# Altium PCB BEESC_v1.PcbDoc (part 1 of 4)
Units mm, origin at the board's own origin, x right, y up, seen from the top; angles counter-clockwise.
Board outline 50 x 44.5 mm, 6 copper layers (Top Layer, GND, SIG, SIG/PWR, GND2, Bottom Layer), stack 1.481 mm thick; 122 components, 109 nets, 495 pads, 357 vias.
Unrouted connection lines stored in the file: 71.
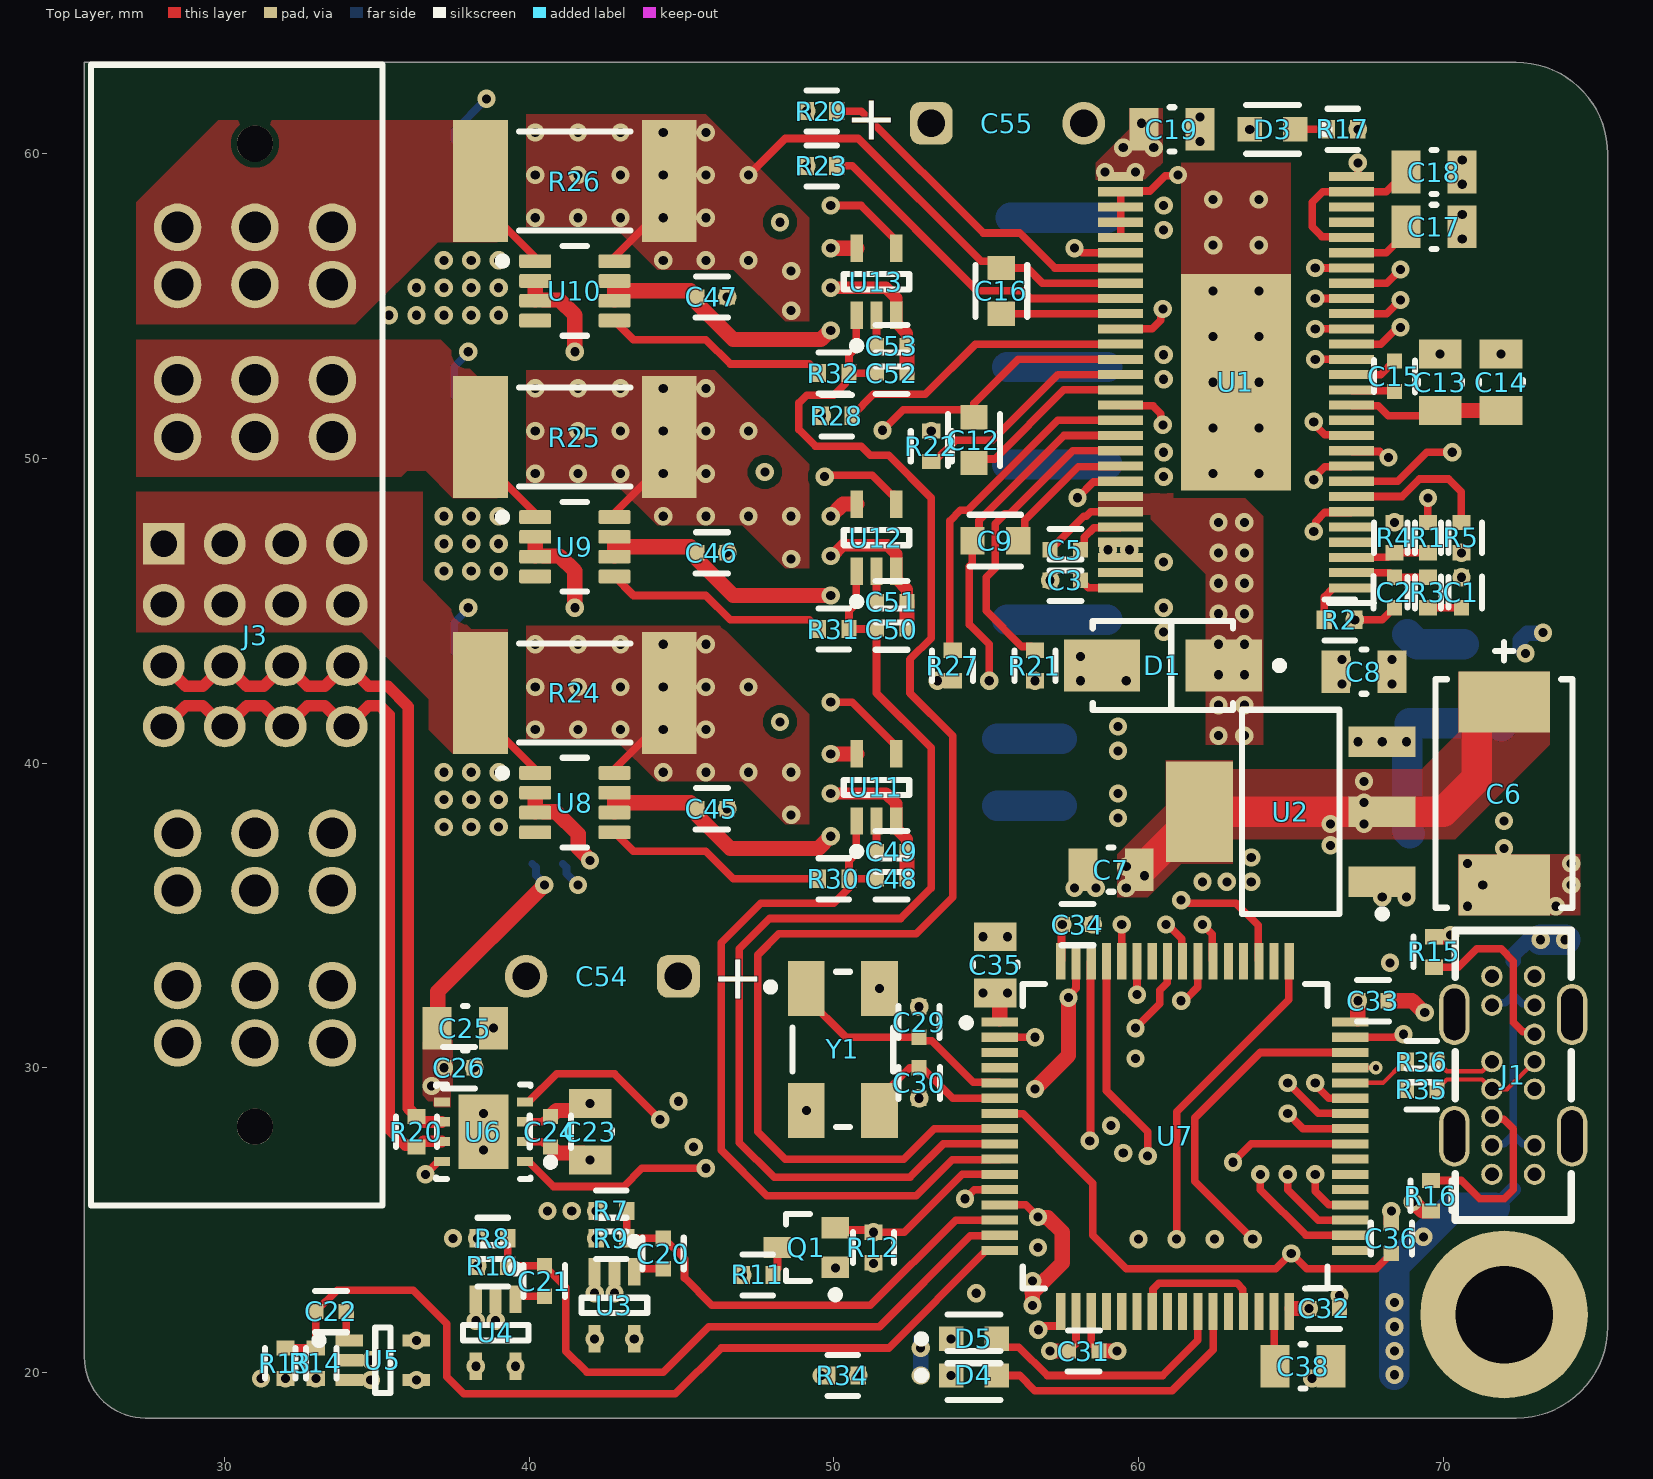
[diagram p0: Top Layer view]
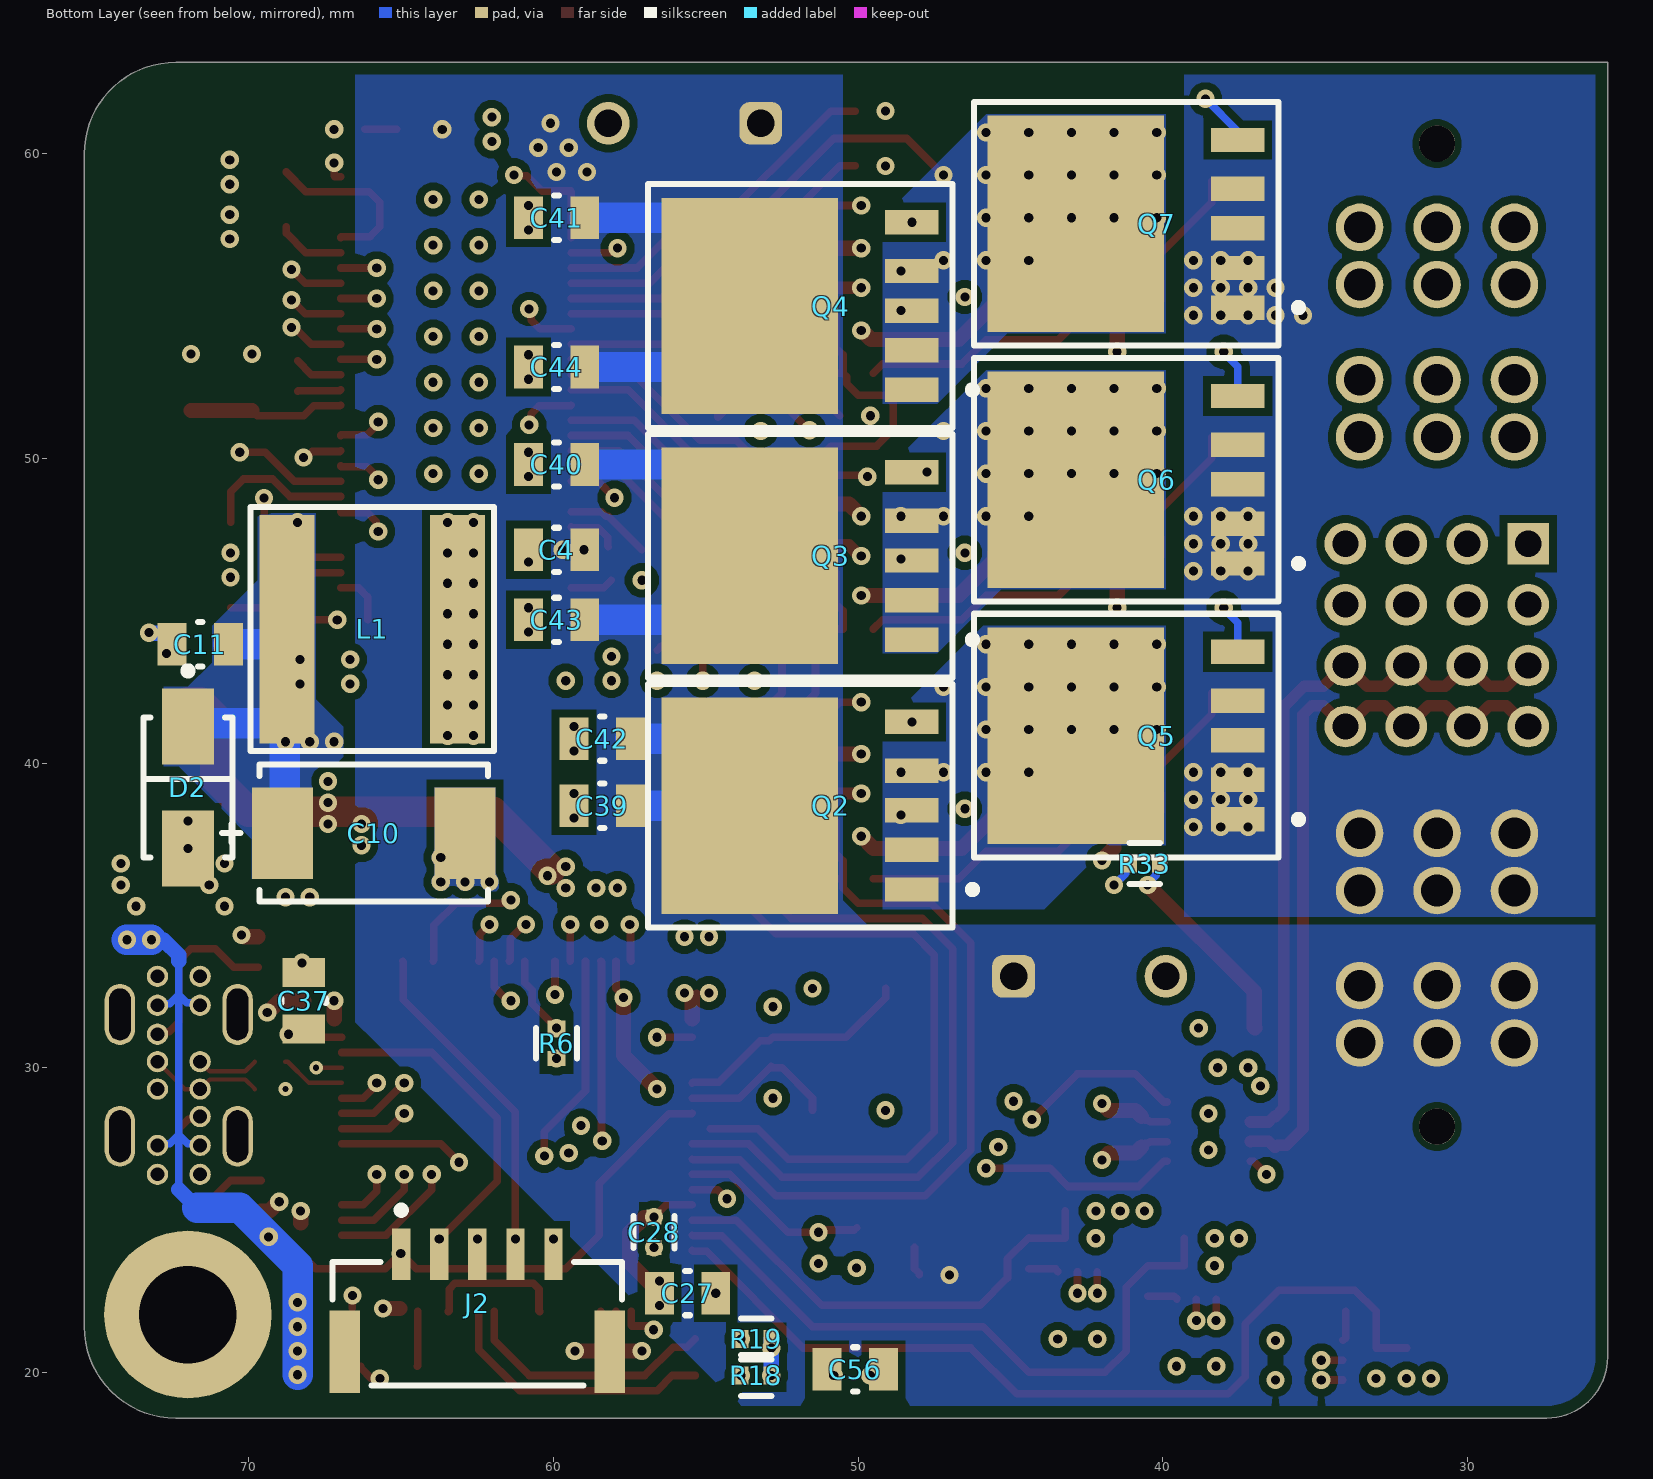
[diagram p1: Bottom Layer view, seen from below]
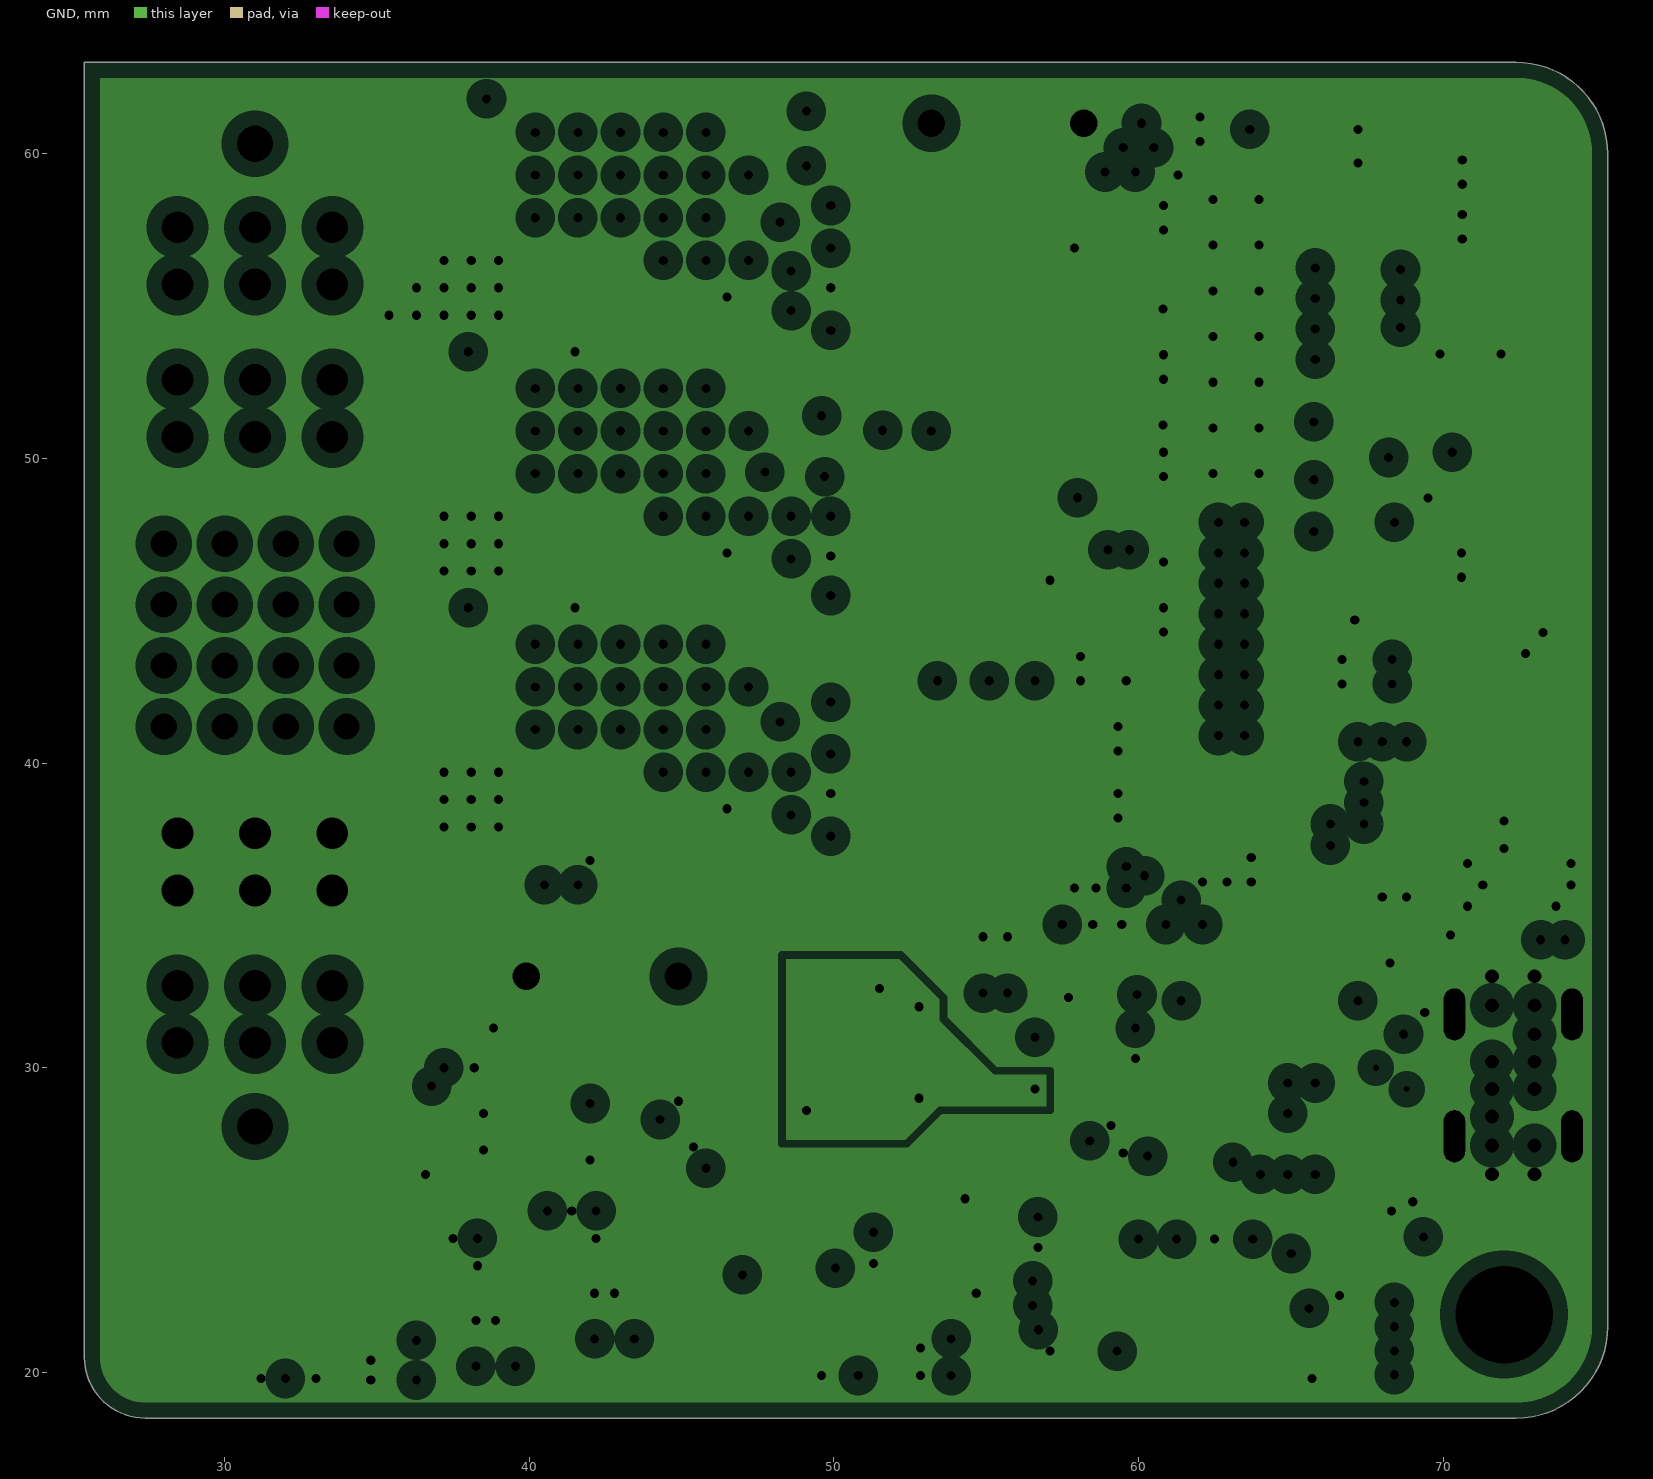
[diagram p2: GND, clearances drawn from the general rule]
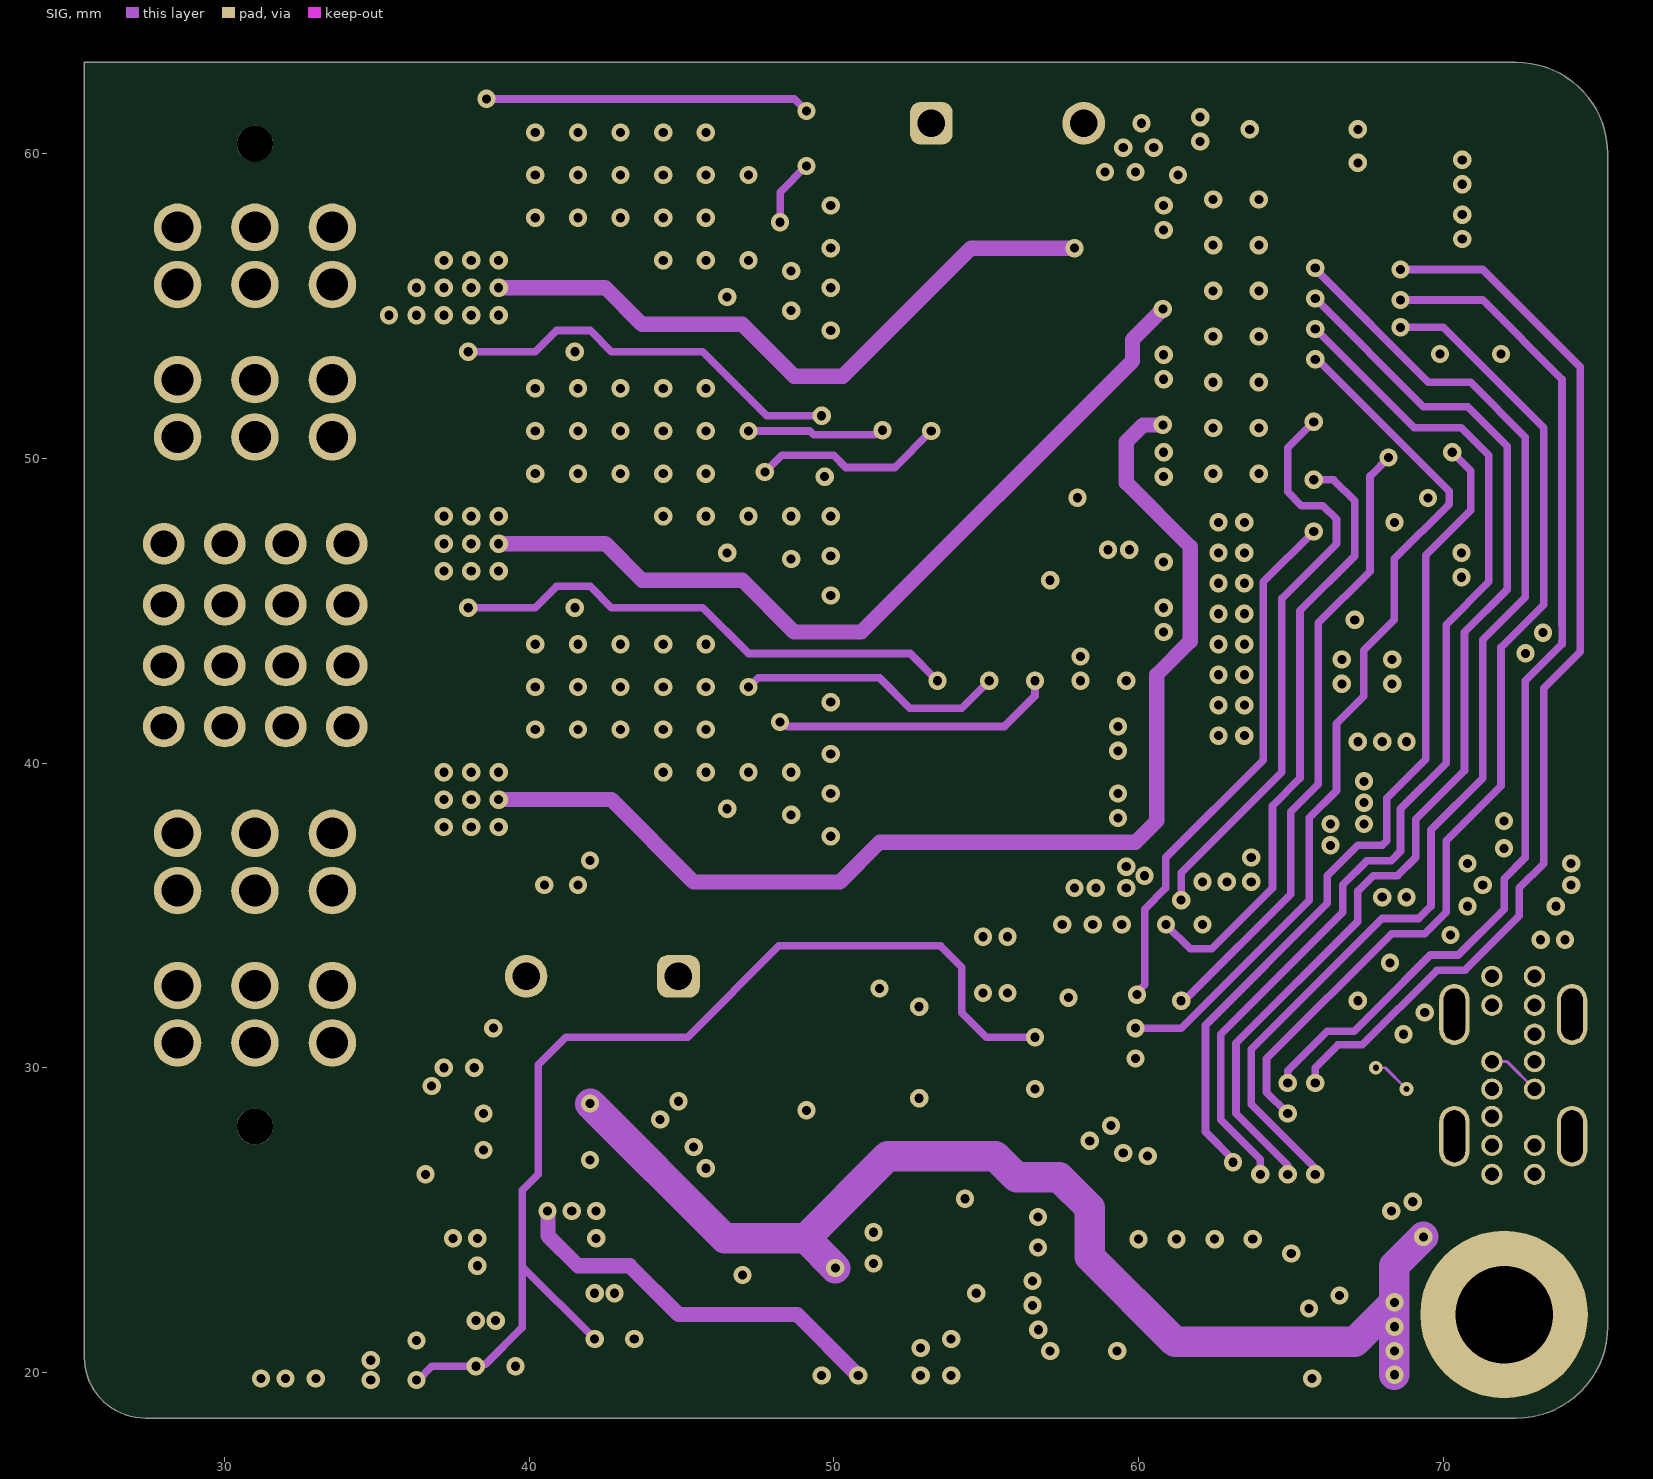
[diagram p3: SIG]
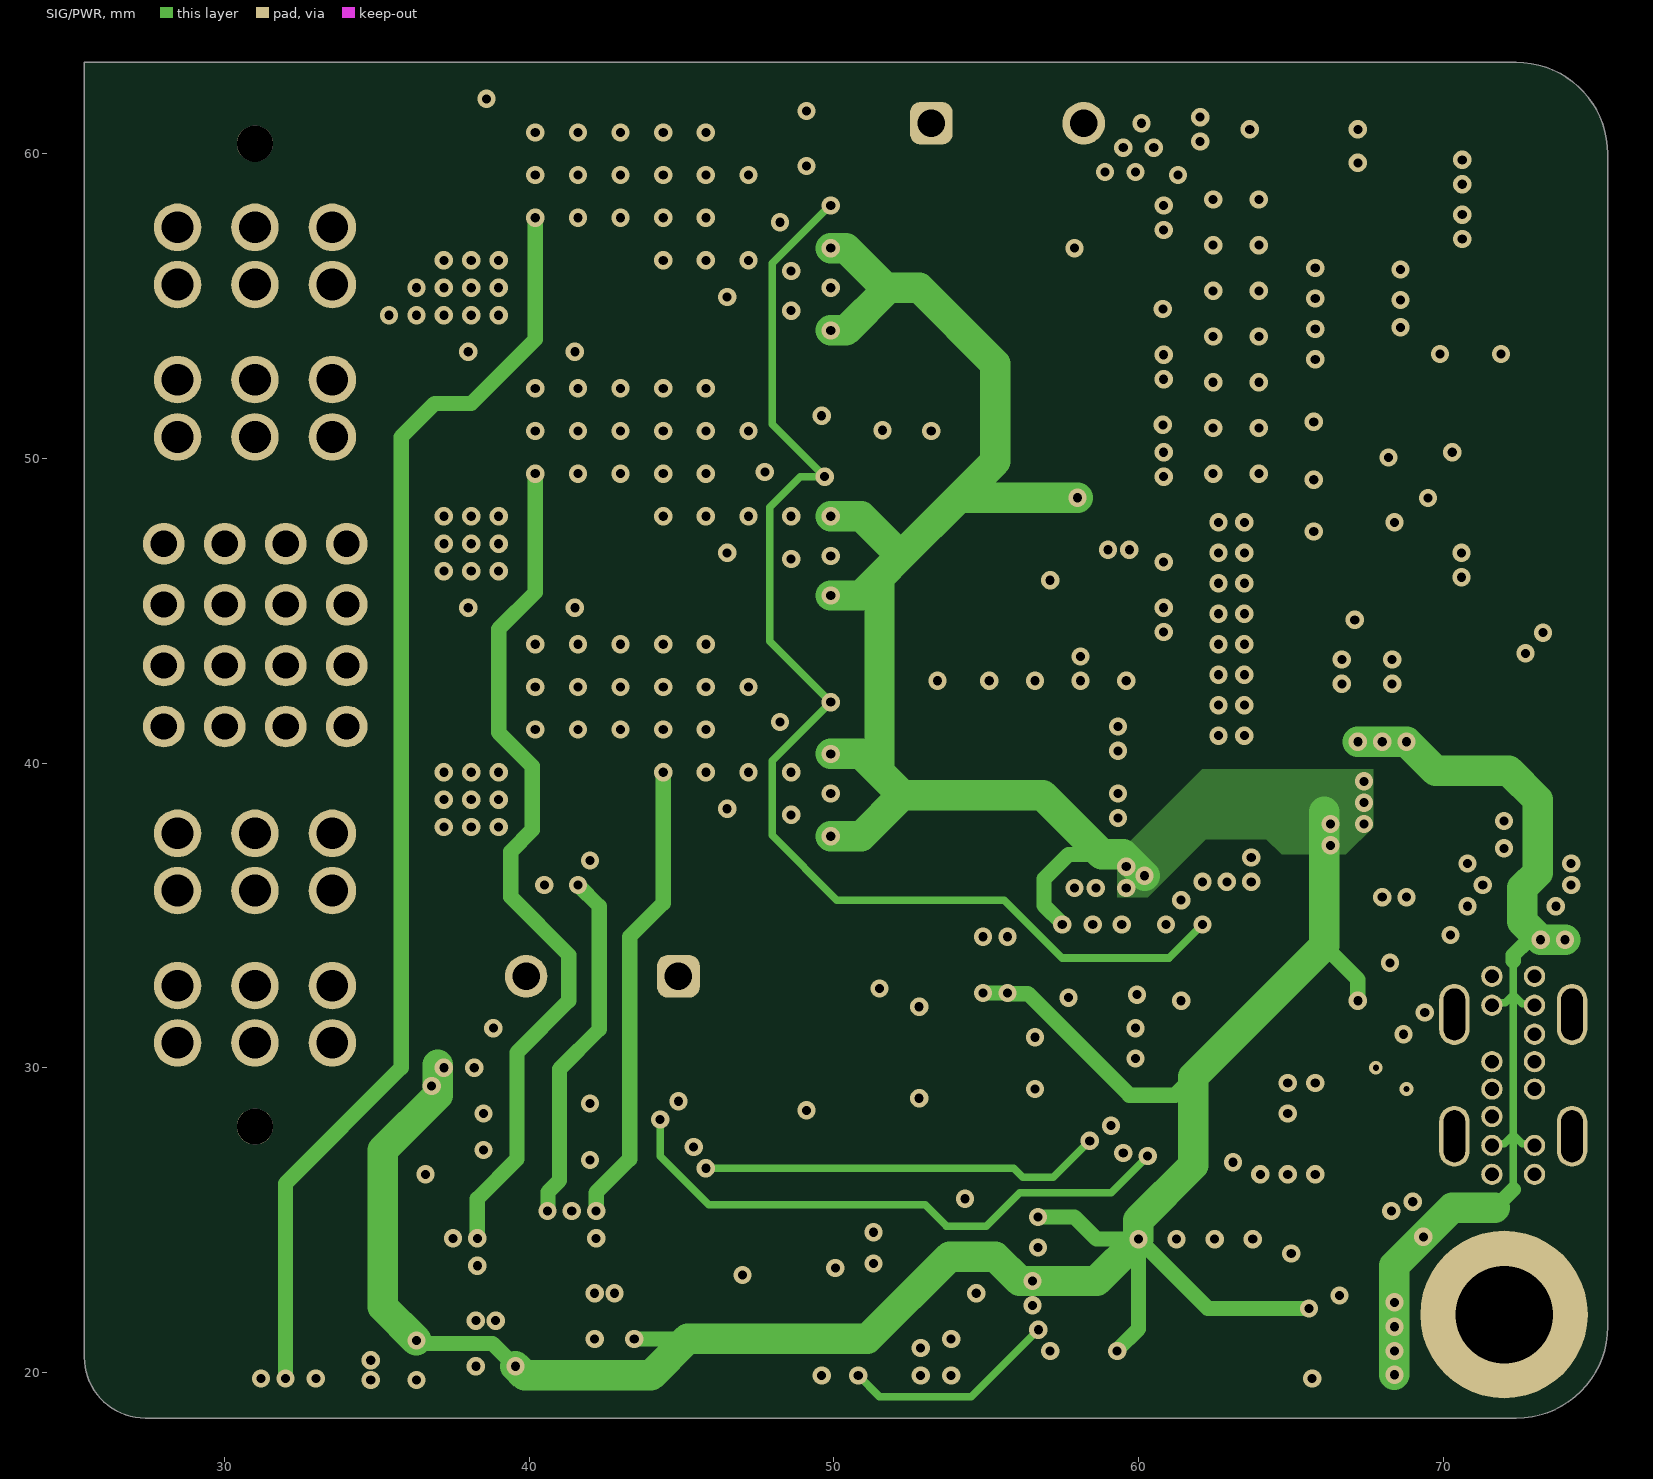
[diagram p4: SIG/PWR]
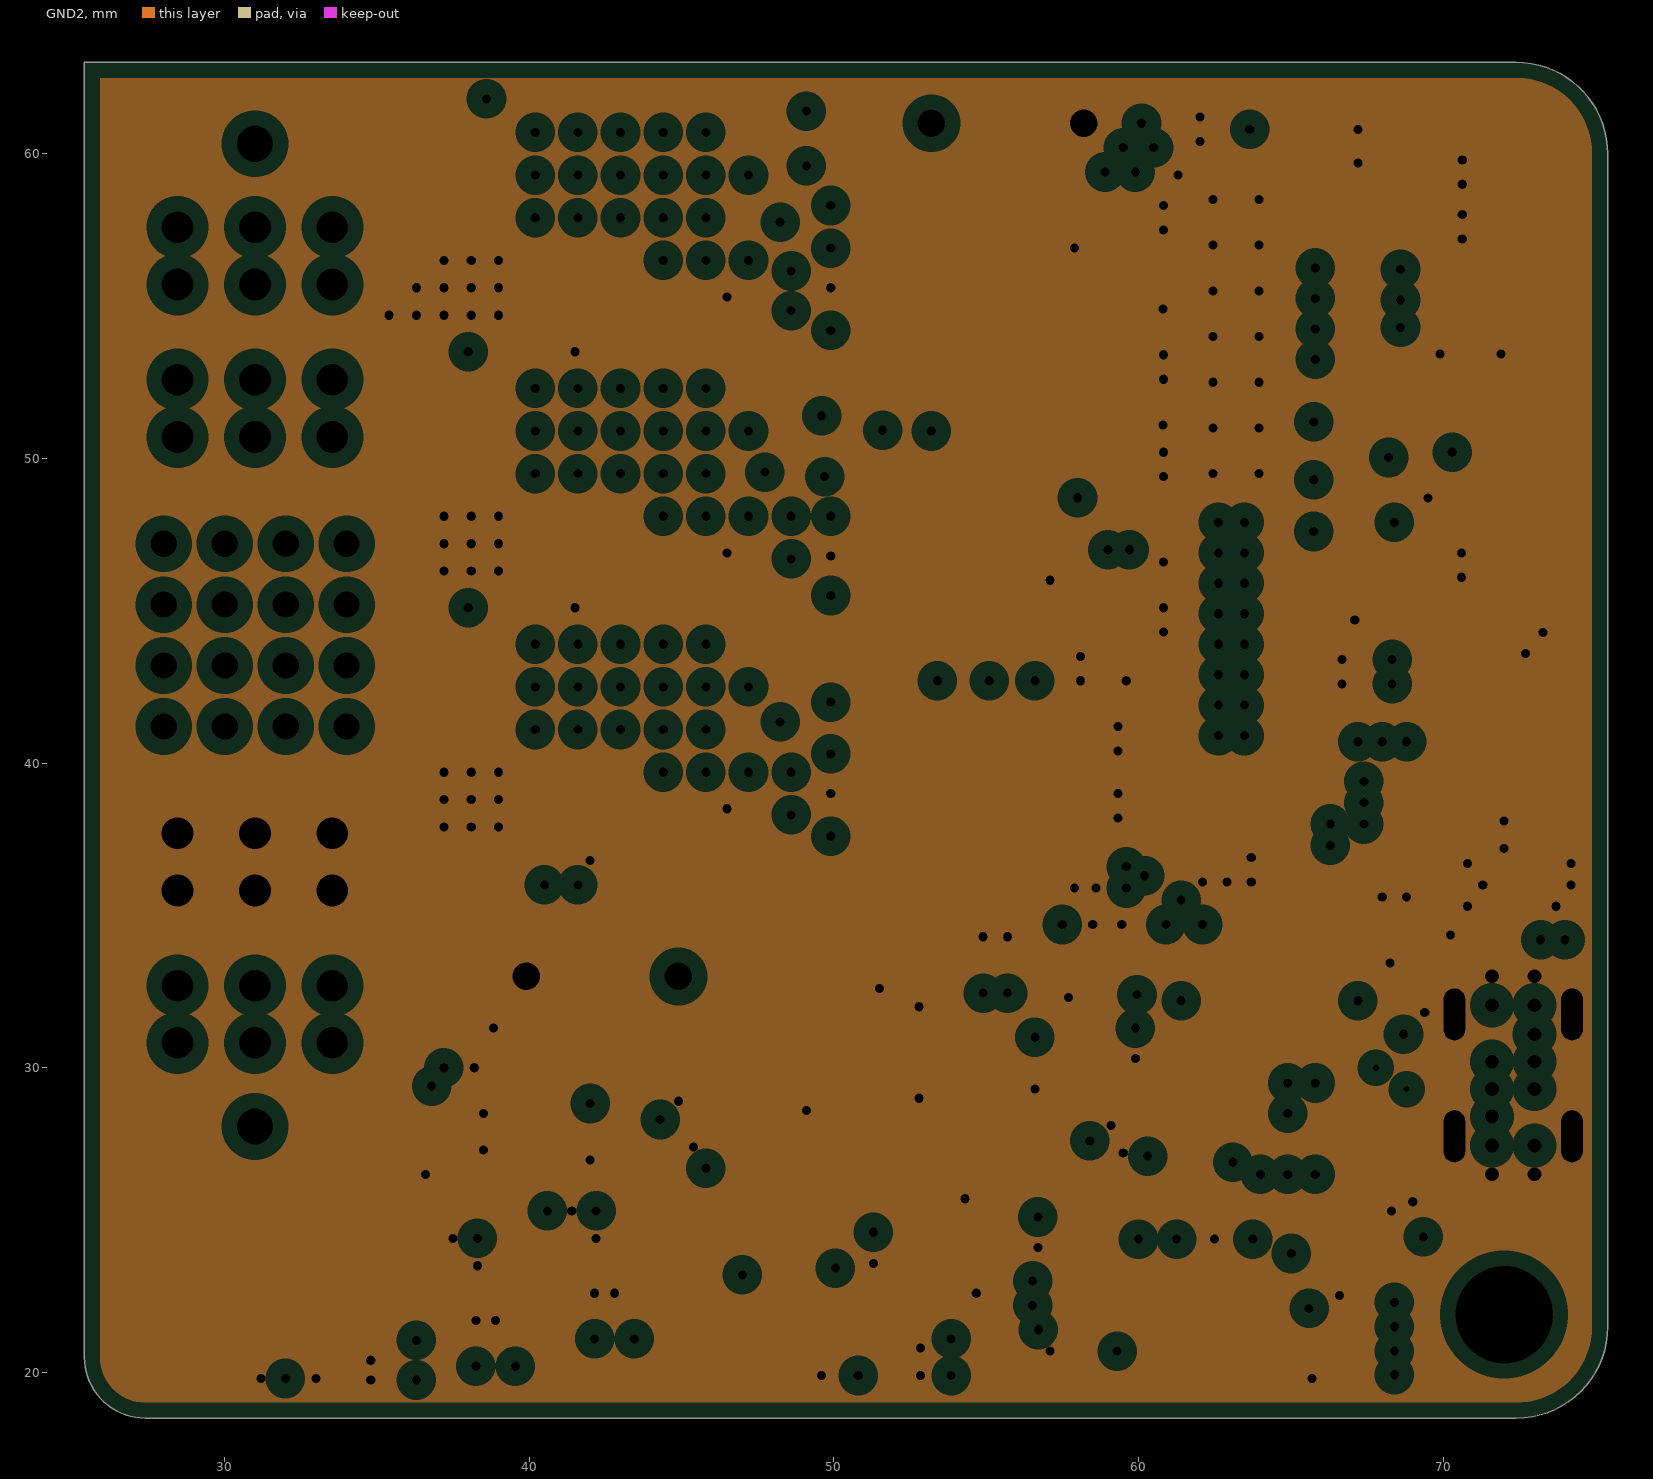
[diagram p5: GND2, clearances drawn from the general rule]
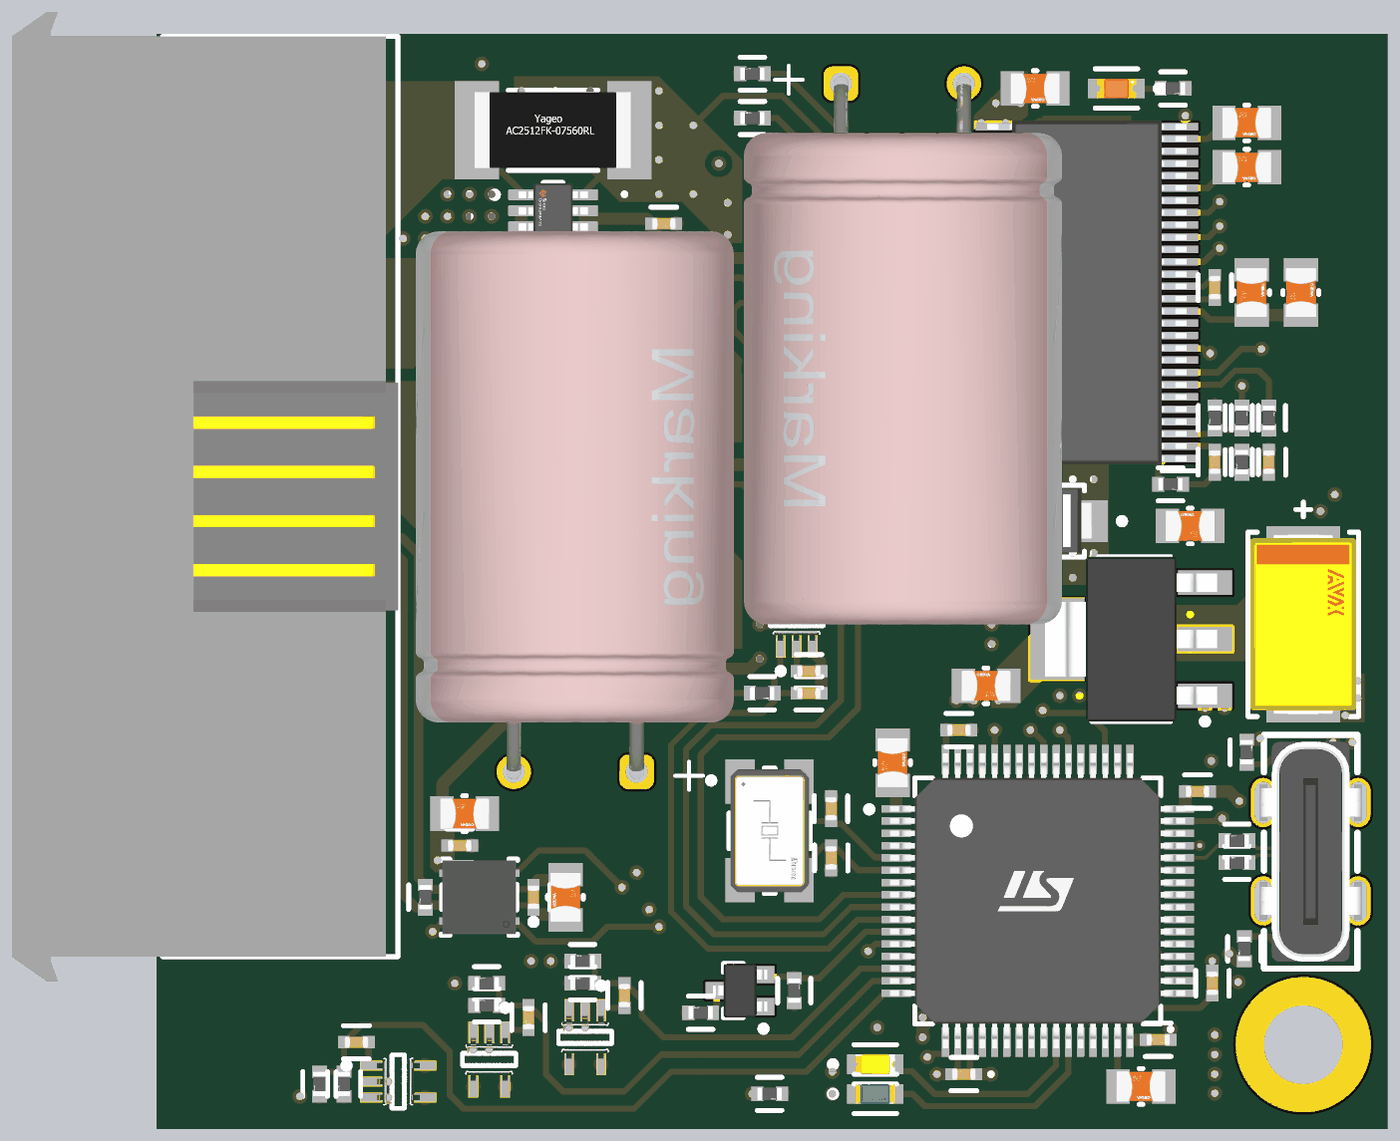
[diagram p7: 3D render of the assembled board from above, using the file's embedded part models]
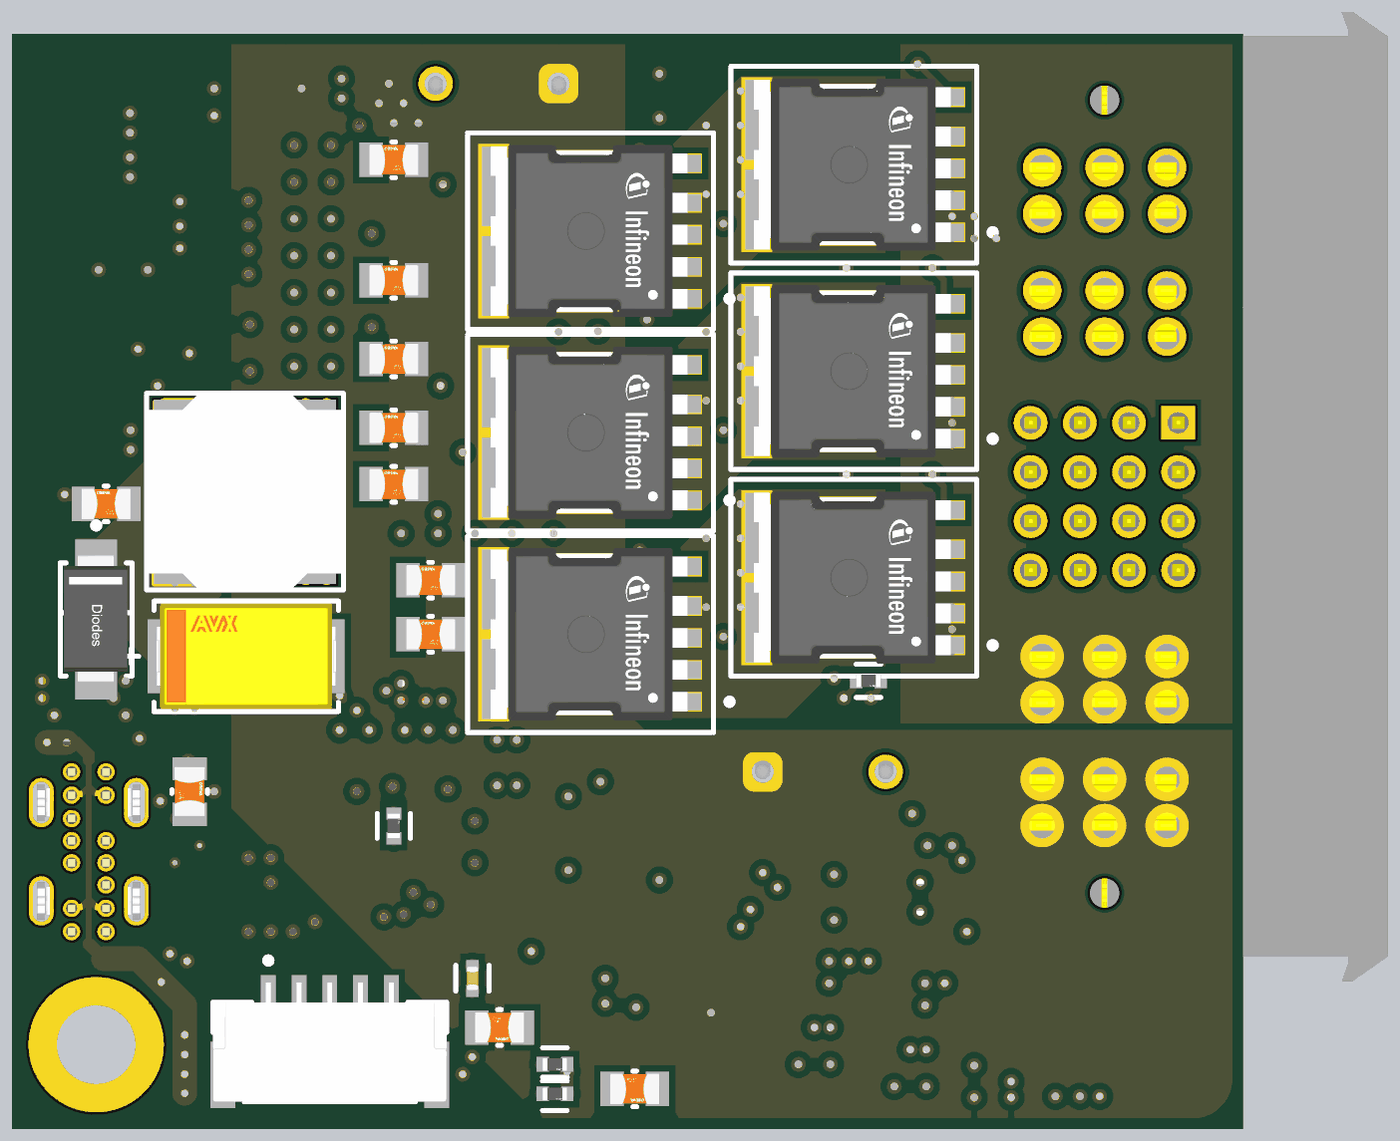
[diagram p8: 3D render of the assembled board from below, using the file's embedded part models]

## Layer stack, top to bottom
Top Solder: solder mask 0.0102, Solder Resist, Dk 3.5
Top Layer: signal copper 0.0356
Dielectric 1: prepreg 0.1, PP-006, Dk 4.2
GND: plane copper 0.0175, net GND
Dielectric 2: core 0.52, PP-006, Dk 4.8
SIG: signal copper 0.0175
Dielectric 3: dielectric 0.1, FR-4, Dk 4.2
SIG/PWR: signal copper 0.0175
Dielectric 4: core 0.52, PP-006, Dk 4.8
GND2: plane copper 0.0175, net GND
Dielectric 5: prepreg 0.1, PP-006, Dk 4.2
Bottom Layer: signal copper 0.0356
Bottom Solder: solder mask 0.0102, Solder Resist, Dk 3.5

## Board outline
27.4,18.5 72.4,18.5 ccw(c72.4,21.5) 75.4,21.5 75.4,60 ccw(c72.4,60) 72.4,63 25.4,63 25.4,20.5 ccw(c27.4,20.5)

## Design rules (kind name [scope] priority, off if disabled: settings)
BoardOutlineClearance [All] p1: gap=0.4 ignorepadtopadclearanceinfootprint=FALSE
Clearance Clearance_USB [InNet('D2_N') OR InNet('D2_P') OR InNet('D_N') OR InNet('D_P')] p1: gap=0.127 ignorepadtopadclearanceinfootprint=TRUE
Clearance Clearance_LOW [InNet('NetC18_1')] p2: gap=0.2 ignorepadtopadclearanceinfootprint=TRUE
Clearance Clearance_MOSFET_GND [InNamedPolygon('GNDA_BOT') OR InNamedPolygon('GNDB_BOT') OR InNamedPolygon('GNDC_BOT')] p3: gap=0.2 ignorepadtopadclearanceinfootprint=TRUE except(0.3: Arc-Poly Arc-Region Track-Poly Track-Region SMDPad-Poly SMDPad-Region THPad-Poly THPad-Region Fill-Poly Fill-Region Poly-Poly Poly-Region Region-Region)
Clearance [All] p4: gap=0.2 ignorepadtopadclearanceinfootprint=TRUE except(0.254: Arc-Poly Arc-Region Track-Poly Track-Region SMDPad-Poly SMDPad-Region THPad-Poly THPad-Region Via-Poly Via-Region Fill-Poly Fill-Region Poly-Poly Poly-Region Region-Region)
DiffPairsRouting DiffPairsRouting_USB [InDifferentialPair('D2') OR InDifferentialPair('D')] p1: maxlimit=0.127 minlimit=0.127 mostfreqgap=0.127 toplayer_minwidth=0.146 toplayer_maxwidth=0.146 toplayer_prefwidth=0.146 midlayer1_minwidth=0.097 midlayer1_maxwidth=0.097 midlayer1_prefwidth=0.097 midlayer2_minwidth=0.097 midlayer2_maxwidth=0.097 midlayer2_prefwidth=0.097 bottomlayer_minwidth=0.146 bottomlayer_maxwidth=0.146 bottomlayer_prefwidth=0.146 impedanceprofiledriven=TRUE impedanceprofileid={7279E37E-4EEC-417B-ABF0-A3F49BF6F39D} impedanceprofilevalue=90.000000 maxuncoupledlength=12.7
DiffPairsRouting [All] p2: maxlimit=0.254 minlimit=0.254 mostfreqgap=0.254 toplayer_minwidth=0.381 toplayer_maxwidth=0.381 toplayer_prefwidth=0.381 midlayer1_minwidth=0.381 midlayer1_maxwidth=0.381 midlayer1_prefwidth=0.381 midlayer2_minwidth=0.381 midlayer2_maxwidth=0.381 midlayer2_prefwidth=0.381 bottomlayer_minwidth=0.381 bottomlayer_maxwidth=0.381 bottomlayer_prefwidth=0.381 maxuncoupledlength=12.7
HoleSize [All] p1: absolutevalues=TRUE maxlimit=5 minlimit=0.2 maxpercent=80.000 minpercent=20.000
MinimumSolderMaskSliver [All] p1: minsoldermaskwidth=0.14
PlaneClearance [All] p1: clearance=0.5
PlaneConnect [All] p1: planeconnectstyle=Direct reliefexpansion=0.508 reliefentries=4 reliefconductorwidth=0.254 reliefairgap=0.254
PolygonConnect [All] p1: connectstyle=Direct reliefconductorwidth=0.254 reliefentries=4 polygonreliefangle="90 Angle" airgapwidth=0.254
RoutingVias [All] p1: holewidth=0.3 width=0.6 viastyle="Through Hole" minholewidth=0.25 minwidth=0.45 maxholewidth=0.3 maxwidth=0.6
SilkToSilkClearance [All] p1: silktosilkclearance=0.15
SilkToSolderMaskClearance [IsPad] p1: minsilkscreentomaskgap=0.15 clearancetoexposedcopper=TRUE
SolderMaskExpansion SolderMaskExpansion_VIA [IsVia] p1: expansion=0.102 istentingtop=TRUE
SolderMaskExpansion [All] p2: expansion=0.102 istentingtop=FALSE
SupplyNets "Schematic Supply Nets_4" [InNet('GND')] p1: voltage=0.000
SupplyNets "Schematic Supply Nets_2" [InNet('+5')] p2: voltage=0.000
SupplyNets "Schematic Supply Nets_1" [InNet('VBAT')] p3: voltage=0.000
SupplyNets "Schematic Supply Nets" [InNet('+3.3')] p4: voltage=0.000
Width [All] p1: maxlimit=1 minlimit=0.15 preferedwidth=0.25 midlayer1_minwidth=0.25 midlayer2_minwidth=0.25 minimp=50.000000 maximp=50.000000 favimp=50.000000
23 further rules are at their usual default settings.

## Classes and differential pairs
component class Main: D3 D4 D5 J1 J2 J3 R15 R16 R17 R18 R19 R35 R36
component class MCU: C27 C28 C29 C30 C31 C32 C33 C34 C35 C36 C37 C38 U7 Y1
component class "CAN Transceiver": C23 C24 C25 C26 R20 U6
component class Power: C39 C40 C41 C42 C43 C44 C45 C46 C47 C48 C49 C50 C51 C52 C53 C54 C55 C56 Q2 Q3 Q4 Q5 Q6 Q7 R21 R22 R23 R24 R25 R26 R27 R28 R29 R30 R31 R32 R33 R34 U8 U9 U10 U11 U12 U13
component class DRV8301: C1 C2 C3 C4 C5 C6 C7 C8 C9 C10 C11 C12 C13 C14 C15 C16 C17 C18 C19 C20 C21 C22 D1 D2 L1 Q1 R1 R2 R3 R4 R5 R6 R7 R8 R9 R10 R11 R12 R13 R14 U1 U2 U3 U4 U5
differential pair D2: +D2_P -D2_N
differential pair D: +D_P -D_N
differential pair CAN: +CAN_P -CAN_N

## Components (designator, comment, footprint, x,y, rotation, side; value= is the part's Value field where it differs from the comment)
C1 "6.8nF" FP-CC0402-MFG 70.6,45.6 r90 top
C2 "120pF" FP-CC0402-MFG 68.4,45.6 r270 top value=6.8nF
C3 "15nF" FP-CC0402-MFG 57.6,46 r180 top value=6.8nF
C4 "4.7uF" FP-CC0805-0_85-MFG 59.9,47 r0 bottom value=6.8nF
C5 "100nF" FP-CC0402-MFG 57.6,47 r180 top value=6.8nF
C6 "100uF" FP-TAJD-MFG 72,39 r90 top
C7 "2.2uF" FP-CC0805-0_85-MFG 59.1,36.5 r180 top value=6.8nF
C8 "2.2uF" FP-CC0805-0_85-MFG 67.4,43 r180 top value=6.8nF
C9 "220nF" FP-CC0603-DA-MFG 55.3,47.3 r180 top value=6.8nF
C10 "100uF" FP-TAJD-MFG 65.9,37.7 r0 bottom
C11 "2.2uF" FP-CC0805-0_85-MFG 71.6,43.9 r0 bottom value=6.8nF
C12 "220nF" FP-CC0603-DA-MFG 54.6,50.6 r90 top value=6.8nF
C13 "2.2uF" FP-CC0805-0_85-MFG 69.9,52.5 r90 top value=6.8nF
C14 "2.2uF" FP-CC0805-0_85-MFG 71.9,52.5 r90 top value=6.8nF
C15 "22nF" FP-CC0402-MFG 68.4,52.7 r90 top value=6.8nF
C16 "220nF" FP-CC0603-DA-MFG 55.5,55.5 r90 top value=6.8nF
C17 "2.2uF" FP-CC0805-0_85-MFG 69.7,57.6 r0 top value=6.8nF
C18 "2.2uF" FP-CC0805-0_85-MFG 69.7,59.4 r0 top value=6.8nF
C19 "4.7uF" FP-CC0805-0_85-MFG 61.1,60.8 r0 top value=6.8nF
C20 "100nF" FP-CC0402-MFG 44.4,23.9 r270 top value=6.8nF
C21 "100nF" FP-CC0402-MFG 40.5,23 r270 top value=6.8nF
C22 "100nF" FP-CC0402-MFG 33.5,22 r0 top value=6.8nF
C23 "10uF" FP-CC0805-0_85-MFG 42,27.9 r270 top value=6.8nF
C24 "100nF" FP-CC0402-MFG 40.7,27.9 r270 top value=6.8nF
C25 "10uF" FP-CC0805-0_85-MFG 37.9,31.3 r0 top value=6.8nF
C26 "100nF" FP-CC0402-MFG 37.7,30 r0 top value=6.8nF
C27 "2.2uF" FP-CC0805-0_85-MFG 55.6,22.6 r180 bottom value=6.8nF
C28 "100nF" FP-CC0402-MFG 56.7,24.6 r270 bottom value=6.8nF
C29 "15pF" FP-CC0402-MFG 52.8,31.5 r270 top value=6.8nF
C30 "15pF" FP-CC0402-MFG 52.8,29.5 r90 top value=6.8nF
C31 "100nF" FP-CC0402-MFG 58.2,20.7 r180 top value=6.8nF
C32 "100nF" FP-CC0402-MFG 66.1,22.1 r0 top value=6.8nF
C33 "100nF" FP-CC0402-MFG 67.7,32.2 r0 top value=6.8nF
C34 "100nF" FP-CC0402-MFG 58,34.7 r0 top value=6.8nF
C35 "4.7uF" FP-CC0805-0_85-MFG 55.3,33.375 r90 top value=6.8nF
C36 "100nF" FP-CC0402-MFG 68.3,24.4 r90 top value=6.8nF
C37 "2.2uF" FP-CC0805-0_85-MFG 68.2,32.2 r90 bottom value=6.8nF
C38 "2.2uF" FP-CC0805-0_85-MFG 65.4,20.2 r0 top value=6.8nF
C39 "4.7uF" FP-CC0805-0_85-MFG 58.4,38.6 r0 bottom value=6.8nF
C40 "4.7uF" FP-CC0805-0_85-MFG 59.9,49.8 r0 bottom value=6.8nF
C41 "4.7uF" FP-CC0805-0_85-MFG 59.9,57.9 r0 bottom value=6.8nF
C42 "4.7uF" FP-CC0805-0_85-MFG 58.4,40.8 r0 bottom value=6.8nF
C43 "4.7uF" FP-CC0805-0_85-MFG 59.9,44.7 r0 bottom value=6.8nF
C44 "4.7uF" FP-CC0805-0_85-MFG 59.9,53 r0 bottom value=6.8nF
C45 "2.2uF 6.3V" FP-CC0402-MFG 46,38.5 r0 top value=6.8nF
C46 "2.2uF 6.3V" FP-CC0402-MFG 46,46.9 r0 top value=6.8nF
C47 "2.2uF 6.3V" FP-CC0402-MFG 46,55.3 r0 top value=6.8nF
C48 "1nF" FP-CC0402-MFG 51.9,36.2 r0 top value=6.8nF
C49 "15nF" FP-CC0402-MFG 51.9,37.1 r0 top value=6.8nF
C50 "1nF" FP-CC0402-MFG 51.9,44.4 r0 top value=6.8nF
C51 "15nF" FP-CC0402-MFG 51.9,45.3 r0 top value=6.8nF
C52 "1nF" FP-CC0402-MFG 51.9,52.8 r0 top value=6.8nF
C53 "15nF" FP-CC0402-MFG 51.9,53.7 r0 top value=6.8nF
C54 "680uF 50V" WCAP-ATG5_D13H20_BENT_MIRROR 42.4,33 r0 top locked
C55 "680uF 50V" WCAP-ATG5_D13H20_BENT_MIRROR 55.7,61 r180 top locked
C56 "2.2uF" FP-CC0805-0_85-MFG 50.1,20.1 r180 bottom value=6.8nF
D1 "SS34" FP-SMA-MFG 60.8,43.2 r180 top
D2 "SMAJ5.0A" FP-SMA-MFG 72,39.2 r270 bottom
D3 "KT-0603R" KT-0603R 64.4,60.8 r180 top
D4 "KT-0603B" KT-0603B 54.6,19.9 r0 top
D5 "KT-0603YG" KT-0603YG 54.6,21.1 r0 top
J1 "TYPE-C 14PLC-H10.0" "TYPE-C 14PLC-H10.0" 73,33 r270 top
J2 "SM05B-GHS-TB(LF)(SN)" SM05B-GHS-TB(LF)(SN) 62.5,21.6 r180 bottom
J3 "MPTC-02-16-02-01-XX-X-RA-LC" SAMTEC_MPTC-02-16-02-01-XX-X-RA-LC 31,44.2 r270 top locked
L1 "22uH" NR8040T220M 65.95,44.4 r0 bottom
Q1 "DMN62D0UW-7" SOT-323 49.1,24.1 r180 top
Q2 "IAUAN04S7N005" IFX-PG-HSOF-5-1-V 50.9,38.6 r0 bottom locked
Q3 "IAUAN04S7N005" IFX-PG-HSOF-5-1-V 50.9,46.8 r0 bottom locked
Q4 "IAUAN04S7N005" IFX-PG-HSOF-5-1-V 50.9,55 r0 bottom locked
Q5 "IAUAN04S7N005" IFX-PG-HSOF-5-1-V 40.2,40.9 r0 bottom locked
Q6 "IAUAN04S7N005" IFX-PG-HSOF-5-1-V 40.2,49.3 r0 bottom locked
Q7 "IAUAN04S7N005" IFX-PG-HSOF-5-1-V 40.2,57.7 r0 bottom locked
R1 "3.3k" FP-AC0402-MFG 69.5,47.4 r90 top
R2 "220k" FP-AC0402-MFG 66.6,44.7 r0 top
R3 "15k" FP-AC0402-MFG 69.5,45.6 r270 top
R4 "18k" FP-AC0402-MFG 68.4,47.4 r270 top
R5 "10k" FP-AC0402-MFG 70.6,47.4 r90 top
R6 "10k" FP-AC0402-MFG 59.9,30.8 r90 bottom
R7 "39k" FP-AC0402-MFG 42.7,25.3 r180 top
R8 "39k" FP-AC0402-MFG 38.8,24.4 r180 top
R9 "2.2k" FP-AC0402-MFG 42.7,24.4 r180 top
R10 "2.2k" FP-AC0402-MFG 38.8,23.5 r180 top
R11 "39k" FP-AC0402-MFG 47.5,23.2 r180 top
R12 "2.2k" FP-AC0402-MFG 51.3,24.1 r90 top
R13 "39k" FP-AC0402-MFG 32,20.3 r270 top
R14 "2.2k" FP-AC0402-MFG 33,20.3 r270 top
R15 "5.1k" FP-AC0402-MFG 69.7,33.8 r90 top
R16 "5.1k" FP-AC0402-MFG 69.6,25.8 r270 top
R17 "4.7k" FP-AC0402-MFG 66.7,60.8 r0 top
R18 "220R" FP-AC0402-MFG 53.35,19.9 r180 bottom
R19 "220R" FP-AC0402-MFG 53.35,21.1 r180 bottom
R20 "120R" FP-AC0402-MFG 36.3,27.9 r270 top
R21 "4.7R" FP-AC0402-MFG 56.6,43.2 r270 top
R22 "4.7R" FP-AC0402-MFG 53.2,50.4 r90 top
R23 "4.7R" FP-AC0402-MFG 49.6,59.6 r180 top
R24 "1.5mR/3W" FP-AC2512-MFG 41.5,42.3 r0 top
R25 "1.5mR/3W" FP-AC2512-MFG 41.5,50.7 r0 top
R26 "1.5mR/3W" FP-AC2512-MFG 41.5,59.1 r0 top
R27 "4.7R" FP-AC0402-MFG 53.9,43.2 r270 top
R28 "4.7R" FP-AC0402-MFG 50.1,51.4 r180 top
R29 "4.7R" FP-AC0402-MFG 49.6,61.4 r180 top
R30 "1k" FP-AC0402-MFG 50,36.2 r0 top
R31 "1k" FP-AC0402-MFG 50,44.4 r0 top
R32 "1k" FP-AC0402-MFG 50,52.8 r0 top
R33 "NTC 10k" FP-AC0402-MFG 40.6,36.7 r180 bottom
R34 "10k" FP-AC0402-MFG 50.3,19.9 r0 top
R35 "22R" FP-AC0402-MFG 69.3,29.3 r180 top
R36 "22R" FP-AC0402-MFG 69.3,30.2 r180 top
U1 "DRV8301DCAR" SOP50P810X120-57N 63.2,52.5 r180 top
U2 "TC2117-3.3V" SOT-223_N 65,38.4 r180 top
U3 "SN74LVC1G66DCK" FP-DCK0005A-MFG 42.8,22.2 r270 top
U4 "SN74LVC1G66DCK" FP-DCK0005A-MFG 38.9,21.3 r270 top
U5 "SN74LVC1G66DCK" FP-DCK0005A-MFG 35.2,20.4 r0 top
U6 "TJA1051TK/3/1J" FP-SOT782-1-MFG 38.5,27.9 r180 top
U7 "STM32F405RGT6" FP-LQFP64-5W-MFG 61.2,27.75 r0 top
U8 "INA296A3" FP-DDF0008A-MFG 41.5,38.7 r0 top
U9 "INA296A3" FP-DDF0008A-MFG 41.5,47.1 r0 top
U10 "INA296A3" FP-DDF0008A-MFG 41.5,55.5 r0 top
U11 "SN74LVC1G66DCK" FP-DCK0005A-MFG 51.4,39.2 r90 top
U12 "SN74LVC1G66DCK" FP-DCK0005A-MFG 51.4,47.4 r90 top
U13 "SN74LVC1G66DCK" FP-DCK0005A-MFG 51.4,55.8 r90 top
Y1 "8MHz 10ppm" FP-ABM3B-MFG 50.3,30.6 r270 top

## Footprints (in the part's own frame and the unit in brackets; to place one, negate y for a bottom-side part, rotate by r counter-clockwise, add the part's x,y. Pads: shape width x height; smd on the part's side, far side on the other; paste and mask are expansions set on the pad)
FP-ABM3B-MFG [mm]
  rect 1.8x1.2 smd paste+0 mask+0: 1(-2,-1.2) 2(2,-1.2) 3(2,1.2) 4(-2,1.2)
  silkscreen extent -2.55,-2.5 2.55,1.65, body extent -3,-1.9 3,1.9, height 0.25
FP-AC0402-MFG [mm]
  rect 0.5x0.6 smd paste+0 mask+0: 1(-0.5,0) 2(0.5,0)
  silkscreen extent -0.5,-0.67 0.5,0.67, body extent -0.85,-0.4 0.85,0.4, height 0.25
FP-AC2512-MFG [mm]
  rect 1.8x4 smd paste+0 mask+0: 1(-3.1,0) 2(3.1,0)
  silkscreen extent -1.83,-1.63 1.83,1.63, body extent -4.1,-2.1 4.1,2.1, height 0.25
FP-CC0402-MFG [mm]
  rect 0.5x0.5 smd paste+0 mask+0: 1(-0.5,0) 2(0.5,0)
  silkscreen extent -0.53,-0.68 0.53,0.67, body extent -0.87,-0.48 0.87,0.48, height 0.25
FP-CC0603-DA-MFG [mm]
  rect 0.8x0.9 smd paste+0 mask+0: 1(-0.75,0) 2(0.75,0)
  silkscreen extent -0.85,-0.85 0.85,0.85, body extent -1.35,-0.75 1.35,0.75, height 0.25
FP-CC0805-0_85-MFG [mm]
  rect 0.95x1.4 smd paste+0 mask+0: 1(-0.925,0) 2(0.925,0)
  silkscreen extent -0.08,-0.72 0.08,0.72, body extent -1,-0.63 1,0.63, height 0.95
FP-DCK0005A-MFG [mm]
  rect 0.9x0.4 smd paste-1000 mask+0: 1(-1.1,0.65) 2(-1.1,0) 3(-1.1,-0.65) 4(1.1,-0.65) 5(1.1,0.65)
  silkscreen extent -2.22,-1.07 0.25,1.07, body extent -1.65,-1.33 1.65,1.33, height 0.25
FP-DDF0008A-MFG [mm]
  rrect22% 1.05x0.45 smd paste+0 mask+0: 1(-1.3,0.975) 2(-1.3,0.325) 3(-1.3,-0.325) 4(-1.3,-0.975) 5(1.3,-0.975) 6(1.3,-0.325) 7(1.3,0.325) 8(1.3,0.975)
  silkscreen extent -2.5,-1.48 0.4,1.48, body extent -1.92,-1.73 1.92,1.73, height 0.25
FP-LQFP64-5W-MFG [mm]
  rect 1.2x0.3 smd paste+0 mask+0: 1(-5.75,3.75) 2(-5.75,3.25) 3(-5.75,2.75) 4(-5.75,2.25) 5(-5.75,1.75) 6(-5.75,1.25) 7(-5.75,0.75) 8(-5.75,0.25) 9(-5.75,-0.25) 10(-5.75,-0.75) 11(-5.75,-1.25) 12(-5.75,-1.75) 13(-5.75,-2.25) 14(-5.75,-2.75) 15(-5.75,-3.25) 16(-5.75,-3.75) 33(5.75,-3.75) 34(5.75,-3.25) 35(5.75,-2.75) 36(5.75,-2.25) 37(5.75,-1.75) 38(5.75,-1.25) 39(5.75,-0.75) 40(5.75,-0.25) 41(5.75,0.25) 42(5.75,0.75) 43(5.75,1.25) 44(5.75,1.75) 45(5.75,2.25) 46(5.75,2.75) 47(5.75,3.25) 48(5.75,3.75)
  rect 0.3x1.2 smd paste+0 mask+0: 17(-3.75,-5.75) 18(-3.25,-5.75) 19(-2.75,-5.75) 20(-2.25,-5.75) 21(-1.75,-5.75) 22(-1.25,-5.75) 23(-0.75,-5.75) 24(-0.25,-5.75) 25(0.25,-5.75) 26(0.75,-5.75) 27(1.25,-5.75) 28(1.75,-5.75) 29(2.25,-5.75) 30(2.75,-5.75) 31(3.25,-5.75) 32(3.75,-5.75) 49(3.75,5.75) 50(3.25,5.75) 51(2.75,5.75) 52(2.25,5.75) 53(1.75,5.75) 54(1.25,5.75) 55(0.75,5.75) 56(0.25,5.75) 57(-0.25,5.75) 58(-0.75,5.75) 59(-1.25,5.75) 60(-1.75,5.75) 61(-2.25,5.75) 62(-2.75,5.75) 63(-3.25,5.75) 64(-3.75,5.75)
  silkscreen extent -6.97,-5 5,5, body extent -6.45,-6.45 6.45,6.45, height 0.25
FP-SMA-MFG [mm]
  rect 2.5x1.7 smd paste+0 mask+0: 1(-2,0) 2(2,0)
  silkscreen extent -3.95,-1.46 2.3,1.46, body extent -2.63,-1.32 2.57,1.29, height 2.4
FP-SOT782-1-MFG [mm]
  rect 0.525x0.3 smd paste+0 mask+0: 1(-1.362,0.975) 2(-1.362,0.325) 3(-1.362,-0.325) 4(-1.362,-0.975) 5(1.362,-0.975) 6(1.362,-0.325) 7(1.362,0.325) 8(1.362,0.975)
  rect 1.65x2.45 smd paste-1000 mask+0: 9(0,0)
  silkscreen extent -2.33,-1.55 1.55,1.55, body extent -1.75,-1.65 1.75,1.65, height 0.25
FP-TAJD-MFG [mm]
  rect 2x3 smd paste+0 mask+0: 1(-3,0) 2(3,0)
  silkscreen extent -3.75,-2.25 4.97,2.25, body extent -4.1,-2.35 4.1,2.35, height 0.25
IFX-PG-HSOF-5-1-V [mm] "HSOF;SMD, 6 pin, 6.70mm L X 7.00mm W X 2.30mm H body"
  rect 1.75x0.8 smd paste-0.05 mask+0: 1(-2.663,2.75) 2(-2.663,1.45) 3(-2.663,0.15) 4(-2.663,-1.15) 5(-2.663,-2.75)
  rect 5.8x7.1 smd paste-3.55 mask-3.55: 6(2.663,0)
  silkscreen extent -4.77,-4 6,4, body extent -2.94,-3.5 5.06,3.5, height 2.3
KT-0603B [mm] "0603 LED Blue"
  rect 0.8x0.8 smd paste+0 mask+0: 1(-0.75,0) 2(0.75,0)
  silkscreen extent -1.85,-0.8 0.86,0.8, body extent -1.33,-0.55 1.33,0.55, height 0.25
KT-0603R [mm] "0603 LED Red"
  rect 0.8x0.8 smd paste+0 mask+0: 1(-0.75,0) 2(0.75,0)
  silkscreen extent -1.85,-0.8 0.86,0.8, body extent -1.25,-0.56 1.25,0.56, height 0.25
KT-0603YG [mm] "0603 LED Yellow Green"
  rect 0.8x0.8 smd paste+0 mask+0: 1(-0.75,0) 2(0.75,0)
  silkscreen extent -1.85,-0.8 0.86,0.8, body extent -1.33,-0.55 1.33,0.55, height 0.25
NR8040T220M [mm]
  rect 1.8x7.5 smd: 1(-2.8,0) 2(2.8,0)
  silkscreen extent -4,-4 4,4, body extent -4,-4 4,4, height 4
SAMTEC_MPTC-02-16-02-01-XX-X-RA-LC [mm]
  rect 1.368x1.368 / inner round 1.368 / far side rect 1.368x1.368 hole 0.86: A01(-3,-2.99)
  round 1.368 hole 0.86: A02(-1,-2.99) A03(1,-2.99) A04(3,-2.99) B01(-3,-0.99) B02(-1,-0.99) B03(1,-0.99) B04(3,-0.99) C01(-3,1.01) C02(-1,1.01) C03(1,1.01) C04(3,1.01) D01(-3,3.01) D02(-1,3.01) D03(1,3.01) D04(3,3.01)
  round 1.56 hole 1.04: P01_1(-13.385,2.54) P01_2(-11.505,2.54) P01_3(-13.385,0) P01_4(-11.505,0) P01_5(-13.385,-2.54) P01_6(-11.505,-2.54) P02_1(-8.385,2.54) P02_2(-6.505,2.54) P02_3(-8.385,0) P02_4(-6.505,0) P02_5(-8.385,-2.54) P02_6(-6.505,-2.54) P03_1(6.505,2.54) P03_2(8.385,2.54) P03_3(6.505,0) P03_4(8.385,0) P03_5(6.505,-2.54) P03_6(8.385,-2.54) P04_1(11.505,2.54) P04_2(13.385,2.54) P04_3(11.505,0) P04_4(13.385,0) P04_5(11.505,-2.54) P04_6(13.385,-2.54)
  round 1.19 hole 1.19 unplated: ""(-16.13,0) ""(16.13,0)
  silkscreen extent -20.6,-5.38 18.72,4.19, body extent -19.72,-11.5 19.72,4.2, height 10.82
SM05B-GHS-TB(LF)(SN) [mm]
  rect 0.6x1.7 smd paste+0 mask+0: 1(-2.5,2.275) 2(-1.25,2.275) 3(0,2.275) 4(1.25,2.275) 5(2.5,2.275)
  rect 1x2.7 smd paste+0 mask+0: 6(-4.35,-0.925) 7(4.35,-0.925)
  silkscreen extent -4.75,-2.02 4.75,3.85, body extent -4.75,-2.02 4.75,2.83, height 4.35
SOP50P810X120-57N [mm]
  rect 1.475x0.3 smd: 1(-3.788,6.75) 2(-3.788,6.25) 3(-3.788,5.75) 4(-3.788,5.25) 5(-3.788,4.75) 6(-3.788,4.25) 7(-3.788,3.75) 8(-3.788,3.25) 9(-3.788,2.75) 10(-3.788,2.25) 11(-3.788,1.75) 12(-3.788,1.25) 13(-3.788,0.75) 14(-3.788,0.25) 15(-3.788,-0.25) 16(-3.788,-0.75) 17(-3.788,-1.25) 18(-3.788,-1.75) 19(-3.788,-2.25) 20(-3.788,-2.75) 21(-3.788,-3.25) 22(-3.788,-3.75) 23(-3.788,-4.25) 24(-3.788,-4.75) 25(-3.788,-5.25) 26(-3.788,-5.75) 27(-3.788,-6.25) 28(-3.788,-6.75) 29(3.788,-6.75) 30(3.788,-6.25) 31(3.788,-5.75) 32(3.788,-5.25) 33(3.788,-4.75) 34(3.788,-4.25) 35(3.788,-3.75) 36(3.788,-3.25) 37(3.788,-2.75) 38(3.788,-2.25) 39(3.788,-1.75) 40(3.788,-1.25) 41(3.788,-0.75) 42(3.788,-0.25) 43(3.788,0.25) 44(3.788,0.75) 45(3.788,1.25) 46(3.788,1.75) 47(3.788,2.25) 48(3.788,2.75) 49(3.788,3.25) 50(3.788,3.75) 51(3.788,4.25) 52(3.788,4.75) 53(3.788,5.25) 54(3.788,5.75) 55(3.788,6.25) 56(3.788,6.75)
  rect 3.61x7.11 smd: 57(0,0)
  silkscreen extent -4.52,7.25 -3.05,7.25, body extent -4.05,-7 4.05,7, height 1.2
SOT-223_N [mm]
  rect 2.2x1 smd: 1(-3,2.3) 2(-3,0) 3(-3,-2.3)
  rect 2.2x3.3 smd: 4(3,0)
  silkscreen extent -3.13,-3.35 1.6,3.47, body extent -3.5,-3.35 3.5,3.35, height 1.8
SOT-323 [mm]
  rect 0.9x0.7 smd: 1(-0.95,0.65) 2(-0.95,-0.65) 3(0.95,0)
  silkscreen extent -1.08,-1.1 0.67,1.67, body extent -1.1,-1.1 1.1,1.1, height 1.07
"TYPE-C 14PLC-H10.0" [mm]
  oval 2x1 hole 0.7 slot 1.7 at 0 deg: 0(1.25,1.23) 0(1.25,-2.63) 0(5.25,1.23) 0(5.25,-2.63)
  round 0.7 hole 0.45: A1(0,0) A4(0.95,0) A5(1.9,0) A6(2.8,0) A7(3.7,0) A9(5.55,0) A12(6.5,0) B1(6.5,-1.4) B4(5.55,-1.4) B5(4.6,-1.4) B6(3.7,-1.4) B7(2.8,-1.4) B9(0.95,-1.4) B12(0,-1.4)
  silkscreen extent -1.5,-2.6 8,1.2, body extent -1.22,-2.78 7.73,1.38, height 10
WCAP-ATG5_D13H20_BENT_MIRROR [mm] "Aluminum Electrolytic Capacitors, 13x20mm, bent horizontal mirrored"
  rrect50% 1.4x1.4 hole 0.9: 1(2.5,0)
  round 1.4 hole 0.9: 2(-2.5,0)
  body extent -6.49,-0.3 6.5,22, height 16.99

## Part data
C1: library part CC0402KRX7R9BB682, "50V 6.8nF X7R ±10% 0402 Multilayer Ceramic Capacitors MLCC - SMD/SMT ROHS", Case Code (Imperial)=0402, Case Code (Metric)=1005, Dielectric=X7R, Dielectric Material=Ceramic, Manufacturer="Yageo Group", Max Operating Temperature=125°C, Min Operating Temperature=-55°C, Supplier Part Number=311-1726-1-ND, Temperature Coefficient=30ppm/°C, Tolerance=10%, Voltage=50V, Case/Package=0402, Category="Ceramic Capacitors", China RoHS=Compliant, ComponentLink1Description=https://datasheet.octopart.com:443/CC0402KRX7R9BB682-Yageo-datasheet-177165144.pdf?src-supplier=IHS, ComponentLink1URL=https://datasheet.octopart.com:443/CC0402KRX7R9BB682-Yageo-datasheet-177165144.pdf?src-supplier=IHS, ComponentLink2Description=https://datasheet.octopart.com:443/CC0402KRX7R9BB682-Yageo-datasheet-78855684.pdf?src-supplier=Upverter, ComponentLink2URL=https://datasheet.octopart.com:443/CC0402KRX7R9BB682-Yageo-datasheet-78855684.pdf?src-supplier=Upverter, ComponentLink3Description=https://datasheet.octopart.com:443/CC0402KRX7R9BB682-Yageo-datasheet-147453679.pdf?src-supplier=Farnell, ComponentLink3URL=https://datasheet.octopart.com:443/CC0402KRX7R9BB682-Yageo-datasheet-147453679.pdf?src-supplier=Farnell, ComponentLink4Description=https://datasheet.octopart.com:443/CC0402KRX7R9BB682-Yageo-datasheet-182029474.pdf?src-supplier=Farnell, ComponentLink4URL=https://datasheet.octopart.com:443/CC0402KRX7R9BB682-Yageo-datasheet-182029474.pdf?src-supplier=Farnell, ComponentLink5Description=https://datasheet.octopart.com:443/CC0402KRX7R9BB682-Yageo-datasheet-140260305.pdf?src-supplier=element14+APAC, ComponentLink5URL=https://datasheet.octopart.com:443/CC0402KRX7R9BB682-Yageo-datasheet-140260305.pdf?src-supplier=element14+APAC, ComponentLink6Description=https://datasheet.octopart.com/CC0402KRX7R9BB682-Yageo-datasheet-10883670.pdf, ComponentLink6URL=https://datasheet.octopart.com/CC0402KRX7R9BB682-Yageo-datasheet-10883670.pdf, ComponentLink7Description=https://datasheet.octopart.com:443/CC0402KRX7R9BB682-Yageo-datasheet-166511530.pdf?src-supplier=Future+Electronics, ComponentLink7URL=https://datasheet.octopart.com:443/CC0402KRX7R9BB682-Yageo-datasheet-166511530.pdf?src-supplier=Future+Electronics, ComponentLink8Description=https://datasheet.octopart.com:443/CC0402KRX7R9BB682-Yageo-datasheet-137700082.pdf?src-supplier=Future+Electronics, ComponentLink8URL=https://datasheet.octopart.com:443/CC0402KRX7R9BB682-Yageo-datasheet-137700082.pdf?src-supplier=Future+Electronics, ComponentLink9Description=https://datasheet.octopart.com:443/CC0402KRX7R9BB682-Yageo-datasheet-137700084.pdf?src-supplier=Future+Electronics, ComponentLink9URL=https://datasheet.octopart.com:443/CC0402KRX7R9BB682-Yageo-datasheet-137700084.pdf?src-supplier=Future+Electronics, ComponentLink10Description=https://datasheet.octopart.com:443/CC0402KRX7R9BB682-Yageo-datasheet-27626582.pdf?src-supplier=Future+Electronics, ComponentLink10URL=https://datasheet.octopart.com:443/CC0402KRX7R9BB682-Yageo-datasheet-27626582.pdf?src-supplier=Future+Electronics, ComponentLink11Description=https://datasheet.octopart.com:443/CC0402KRX7R9BB682-Yageo-datasheet-24578986.pdf?src-supplier=Future+Electronics, ComponentLink11URL=https://datasheet.octopart.com:443/CC0402KRX7R9BB682-Yageo-datasheet-24578986.pdf?src-supplier=Future+Electronics, ComponentLink12Description=https://datasheet.octopart.com:443/CC0402KRX7R9BB682-Yageo-datasheet-15895757.pdf?src-supplier=Future+Electronics, ComponentLink12URL=https://datasheet.octopart.com:443/CC0402KRX7R9BB682-Yageo-datasheet-15895757.pdf?src-supplier=Future+Electronics, ComponentLink13Description=https://datasheet.octopart.com:443/CC0402KRX7R9BB682-Yageo-datasheet-12526321.pdf?src-supplier=Future+Electronics, ComponentLink13URL=https://datasheet.octopart.com:443/CC0402KRX7R9BB682-Yageo-datasheet-12526321.pdf?src-supplier=Future+Electronics, ComponentLink14Description=https://datasheet.octopart.com:443/CC0402KRX7R9BB682-Yageo-datasheet-178018872.pdf?src-supplier=Burklin+Elektronik, ComponentLink14URL=https://datasheet.octopart.com:443/CC0402KRX7R9BB682-Yageo-datasheet-178018872.pdf?src-supplier=Burklin+Elektronik, ComponentLink15Description=https://datasheet.octopart.com:443/CC0402KRX7R9BB682-Yageo-Group-datasheet-165992755.pdf?src-supplier=ODG+(Origin+Data+Global), ComponentLink15URL=https://datasheet.octopart.com:443/CC0402KRX7R9BB682-Yageo-Group-datasheet-165992755.pdf?src-supplier=ODG+(Origin+Data+Global), ComponentLink16Description=https://datasheet.octopart.com:443/CC0402KRX7R9BB682-Yageo-datasheet-120101875.pdf?src-supplier=Megastar, ComponentLink16URL=https://datasheet.octopart.com:443/CC0402KRX7R9BB682-Yageo-datasheet-120101875.pdf?src-supplier=Megastar, ComponentLink17Description=https://datasheet.octopart.com:443/CC0402KRX7R9BB682-Yageo-datasheet-62336348.pdf?src-supplier=Newark, ComponentLink17URL=https://datasheet.octopart.com:443/CC0402KRX7R9BB682-Yageo-datasheet-62336348.pdf?src-supplier=Newark, ComponentLink18Description=http://sigma.octopart.com:80/conflict_mineral_statement/Yageo-company-3.pdf?src-supplier=Compliance+Statements, ComponentLink18URL=http://sigma.octopart.com:80/conflict_mineral_statement/Yageo-company-3.pdf?src-supplier=Compliance+Statements, ComponentLink19Description=http://sigma.octopart.com:80/rohs_statement/Yageo-company-2.pdf?src-supplier=Compliance+Statements, ComponentLink19URL=http://sigma.octopart.com:80/rohs_statement/Yageo-company-2.pdf?src-supplier=Compliance+Statements, Composition=Ceramic, Depth=500µm, Halogen Free="Halogen Free", Height=500µm, Lead Free="Lead Free", Length=1mm, Lifecycle Status=Production, Manufacturer Part Number=CC0402KRX7R9BB682, Material=Ceramic, Mounting Technology="Surface Mount", Number of Terminals=2, Packaging="Tape and Reel", Pins=2, Pricing="1=0.1, 10=0.024, 50=0.0156, 100=0.0133, 500=0.00934, 1000=0.00812, 2500=0.00685, 5000=0.00609 (USD)", Radiation Hardening=No, REACH SVHC=Yes, RoHS=Compliant, Schedule B="8532240020, 8532240020|8532240020|8532240020|8532240020|8532240020|8532240020|8532240020|8532240020|8532240020|8532240020|8532240020|8532240020|8532240020|8532240020|8532240020|8532240020|8532240020|8532240020|8532240020|8532240020|8532240020|8532240020|8532240020|85", Stock=93415, Supplier=DigiKey, Termination=SMD/SMT, Thickness=558.8µm, Voltage Rating=50V, Voltage Rating (DC)=50V, Weight=652.039032µg, Width=500µm
C2: library part CC0402JRNPO9BN121, "120pF 50V NP0 ±5% 0402 Multilayer Ceramic Capacitors MLCC - SMD/SMT ROHS", Case Code (Imperial)=0402, Case Code (Metric)=1005, Dielectric=X7R, Dielectric Material=Ceramic, Manufacturer="Yageo Group", Manufacturer Part Number=CC0402KRX7R9BB682, Max Operating Temperature=125°C, Min Operating Temperature=-55°C, Supplier Part Number=311-1726-1-ND, Temperature Coefficient=30ppm/°C, Tolerance=10%, Voltage=50V, Case/Package=0402, Category="Ceramic Capacitors", China RoHS=Compliant, ComponentLink1Description=https://datasheet.octopart.com:443/CC0402KRX7R9BB682-Yageo-datasheet-177165144.pdf?src-supplier=IHS, ComponentLink1URL=https://datasheet.octopart.com:443/CC0402KRX7R9BB682-Yageo-datasheet-177165144.pdf?src-supplier=IHS, ComponentLink2Description=https://datasheet.octopart.com:443/CC0402KRX7R9BB682-Yageo-datasheet-78855684.pdf?src-supplier=Upverter, ComponentLink2URL=https://datasheet.octopart.com:443/CC0402KRX7R9BB682-Yageo-datasheet-78855684.pdf?src-supplier=Upverter, ComponentLink3Description=https://datasheet.octopart.com:443/CC0402KRX7R9BB682-Yageo-datasheet-147453679.pdf?src-supplier=Farnell, ComponentLink3URL=https://datasheet.octopart.com:443/CC0402KRX7R9BB682-Yageo-datasheet-147453679.pdf?src-supplier=Farnell, ComponentLink4Description=https://datasheet.octopart.com:443/CC0402KRX7R9BB682-Yageo-datasheet-182029474.pdf?src-supplier=Farnell, ComponentLink4URL=https://datasheet.octopart.com:443/CC0402KRX7R9BB682-Yageo-datasheet-182029474.pdf?src-supplier=Farnell, ComponentLink5Description=https://datasheet.octopart.com:443/CC0402KRX7R9BB682-Yageo-datasheet-140260305.pdf?src-supplier=element14+APAC, ComponentLink5URL=https://datasheet.octopart.com:443/CC0402KRX7R9BB682-Yageo-datasheet-140260305.pdf?src-supplier=element14+APAC, ComponentLink6Description=https://datasheet.octopart.com/CC0402KRX7R9BB682-Yageo-datasheet-10883670.pdf, ComponentLink6URL=https://datasheet.octopart.com/CC0402KRX7R9BB682-Yageo-datasheet-10883670.pdf, ComponentLink7Description=https://datasheet.octopart.com:443/CC0402KRX7R9BB682-Yageo-datasheet-166511530.pdf?src-supplier=Future+Electronics, ComponentLink7URL=https://datasheet.octopart.com:443/CC0402KRX7R9BB682-Yageo-datasheet-166511530.pdf?src-supplier=Future+Electronics, ComponentLink8Description=https://datasheet.octopart.com:443/CC0402KRX7R9BB682-Yageo-datasheet-137700082.pdf?src-supplier=Future+Electronics, ComponentLink8URL=https://datasheet.octopart.com:443/CC0402KRX7R9BB682-Yageo-datasheet-137700082.pdf?src-supplier=Future+Electronics, ComponentLink9Description=https://datasheet.octopart.com:443/CC0402KRX7R9BB682-Yageo-datasheet-137700084.pdf?src-supplier=Future+Electronics, ComponentLink9URL=https://datasheet.octopart.com:443/CC0402KRX7R9BB682-Yageo-datasheet-137700084.pdf?src-supplier=Future+Electronics, ComponentLink10Description=https://datasheet.octopart.com:443/CC0402KRX7R9BB682-Yageo-datasheet-27626582.pdf?src-supplier=Future+Electronics, ComponentLink10URL=https://datasheet.octopart.com:443/CC0402KRX7R9BB682-Yageo-datasheet-27626582.pdf?src-supplier=Future+Electronics, ComponentLink11Description=https://datasheet.octopart.com:443/CC0402KRX7R9BB682-Yageo-datasheet-24578986.pdf?src-supplier=Future+Electronics, ComponentLink11URL=https://datasheet.octopart.com:443/CC0402KRX7R9BB682-Yageo-datasheet-24578986.pdf?src-supplier=Future+Electronics, ComponentLink12Description=https://datasheet.octopart.com:443/CC0402KRX7R9BB682-Yageo-datasheet-15895757.pdf?src-supplier=Future+Electronics, ComponentLink12URL=https://datasheet.octopart.com:443/CC0402KRX7R9BB682-Yageo-datasheet-15895757.pdf?src-supplier=Future+Electronics, ComponentLink13Description=https://datasheet.octopart.com:443/CC0402KRX7R9BB682-Yageo-datasheet-12526321.pdf?src-supplier=Future+Electronics, ComponentLink13URL=https://datasheet.octopart.com:443/CC0402KRX7R9BB682-Yageo-datasheet-12526321.pdf?src-supplier=Future+Electronics, ComponentLink14Description=https://datasheet.octopart.com:443/CC0402KRX7R9BB682-Yageo-datasheet-178018872.pdf?src-supplier=Burklin+Elektronik, ComponentLink14URL=https://datasheet.octopart.com:443/CC0402KRX7R9BB682-Yageo-datasheet-178018872.pdf?src-supplier=Burklin+Elektronik, ComponentLink15Description=https://datasheet.octopart.com:443/CC0402KRX7R9BB682-Yageo-Group-datasheet-165992755.pdf?src-supplier=ODG+(Origin+Data+Global), ComponentLink15URL=https://datasheet.octopart.com:443/CC0402KRX7R9BB682-Yageo-Group-datasheet-165992755.pdf?src-supplier=ODG+(Origin+Data+Global), ComponentLink16Description=https://datasheet.octopart.com:443/CC0402KRX7R9BB682-Yageo-datasheet-120101875.pdf?src-supplier=Megastar, ComponentLink16URL=https://datasheet.octopart.com:443/CC0402KRX7R9BB682-Yageo-datasheet-120101875.pdf?src-supplier=Megastar, ComponentLink17Description=https://datasheet.octopart.com:443/CC0402KRX7R9BB682-Yageo-datasheet-62336348.pdf?src-supplier=Newark, ComponentLink17URL=https://datasheet.octopart.com:443/CC0402KRX7R9BB682-Yageo-datasheet-62336348.pdf?src-supplier=Newark, ComponentLink18Description=http://sigma.octopart.com:80/conflict_mineral_statement/Yageo-company-3.pdf?src-supplier=Compliance+Statements, ComponentLink18URL=http://sigma.octopart.com:80/conflict_mineral_statement/Yageo-company-3.pdf?src-supplier=Compliance+Statements, ComponentLink19Description=http://sigma.octopart.com:80/rohs_statement/Yageo-company-2.pdf?src-supplier=Compliance+Statements, ComponentLink19URL=http://sigma.octopart.com:80/rohs_statement/Yageo-company-2.pdf?src-supplier=Compliance+Statements, Composition=Ceramic, Depth=500µm, Halogen Free="Halogen Free", Height=500µm, Lead Free="Lead Free", Length=1mm, Lifecycle Status=Production, Material=Ceramic, Mounting Technology="Surface Mount", Number of Terminals=2, Packaging="Tape and Reel", Pins=2, Pricing="1=0.1, 10=0.024, 50=0.0156, 100=0.0133, 500=0.00934, 1000=0.00812, 2500=0.00685, 5000=0.00609 (USD)", Radiation Hardening=No, REACH SVHC=Yes, RoHS=Compliant, Schedule B="8532240020, 8532240020|8532240020|8532240020|8532240020|8532240020|8532240020|8532240020|8532240020|8532240020|8532240020|8532240020|8532240020|8532240020|8532240020|8532240020|8532240020|8532240020|8532240020|8532240020|8532240020|8532240020|8532240020|8532240020|85", Stock=93415, Supplier=DigiKey, Termination=SMD/SMT, Thickness=558.8µm, Voltage Rating=50V, Voltage Rating (DC)=50V, Weight=652.039032µg, Width=500µm
C3 C49 C51 C53: library part CC0402KRX7R9BB153, "15nF 50V X7R ±10% 0402 Multilayer Ceramic Capacitors MLCC - SMD/SMT ROHS", Case Code (Imperial)=0402, Case Code (Metric)=1005, Dielectric=X7R, Dielectric Material=Ceramic, Manufacturer="Yageo Group", Manufacturer Part Number=CC0402KRX7R9BB682, Max Operating Temperature=125°C, Min Operating Temperature=-55°C, Supplier Part Number=311-1726-1-ND, Temperature Coefficient=30ppm/°C, Tolerance=10%, Voltage=50V, Case/Package=0402, Category="Ceramic Capacitors", China RoHS=Compliant, ComponentLink1Description=https://datasheet.octopart.com:443/CC0402KRX7R9BB682-Yageo-datasheet-177165144.pdf?src-supplier=IHS, ComponentLink1URL=https://datasheet.octopart.com:443/CC0402KRX7R9BB682-Yageo-datasheet-177165144.pdf?src-supplier=IHS, ComponentLink2Description=https://datasheet.octopart.com:443/CC0402KRX7R9BB682-Yageo-datasheet-78855684.pdf?src-supplier=Upverter, ComponentLink2URL=https://datasheet.octopart.com:443/CC0402KRX7R9BB682-Yageo-datasheet-78855684.pdf?src-supplier=Upverter, ComponentLink3Description=https://datasheet.octopart.com:443/CC0402KRX7R9BB682-Yageo-datasheet-147453679.pdf?src-supplier=Farnell, ComponentLink3URL=https://datasheet.octopart.com:443/CC0402KRX7R9BB682-Yageo-datasheet-147453679.pdf?src-supplier=Farnell, ComponentLink4Description=https://datasheet.octopart.com:443/CC0402KRX7R9BB682-Yageo-datasheet-182029474.pdf?src-supplier=Farnell, ComponentLink4URL=https://datasheet.octopart.com:443/CC0402KRX7R9BB682-Yageo-datasheet-182029474.pdf?src-supplier=Farnell, ComponentLink5Description=https://datasheet.octopart.com:443/CC0402KRX7R9BB682-Yageo-datasheet-140260305.pdf?src-supplier=element14+APAC, ComponentLink5URL=https://datasheet.octopart.com:443/CC0402KRX7R9BB682-Yageo-datasheet-140260305.pdf?src-supplier=element14+APAC, ComponentLink6Description=https://datasheet.octopart.com/CC0402KRX7R9BB682-Yageo-datasheet-10883670.pdf, ComponentLink6URL=https://datasheet.octopart.com/CC0402KRX7R9BB682-Yageo-datasheet-10883670.pdf, ComponentLink7Description=https://datasheet.octopart.com:443/CC0402KRX7R9BB682-Yageo-datasheet-166511530.pdf?src-supplier=Future+Electronics, ComponentLink7URL=https://datasheet.octopart.com:443/CC0402KRX7R9BB682-Yageo-datasheet-166511530.pdf?src-supplier=Future+Electronics, ComponentLink8Description=https://datasheet.octopart.com:443/CC0402KRX7R9BB682-Yageo-datasheet-137700082.pdf?src-supplier=Future+Electronics, ComponentLink8URL=https://datasheet.octopart.com:443/CC0402KRX7R9BB682-Yageo-datasheet-137700082.pdf?src-supplier=Future+Electronics, ComponentLink9Description=https://datasheet.octopart.com:443/CC0402KRX7R9BB682-Yageo-datasheet-137700084.pdf?src-supplier=Future+Electronics, ComponentLink9URL=https://datasheet.octopart.com:443/CC0402KRX7R9BB682-Yageo-datasheet-137700084.pdf?src-supplier=Future+Electronics, ComponentLink10Description=https://datasheet.octopart.com:443/CC0402KRX7R9BB682-Yageo-datasheet-27626582.pdf?src-supplier=Future+Electronics, ComponentLink10URL=https://datasheet.octopart.com:443/CC0402KRX7R9BB682-Yageo-datasheet-27626582.pdf?src-supplier=Future+Electronics, ComponentLink11Description=https://datasheet.octopart.com:443/CC0402KRX7R9BB682-Yageo-datasheet-24578986.pdf?src-supplier=Future+Electronics, ComponentLink11URL=https://datasheet.octopart.com:443/CC0402KRX7R9BB682-Yageo-datasheet-24578986.pdf?src-supplier=Future+Electronics, ComponentLink12Description=https://datasheet.octopart.com:443/CC0402KRX7R9BB682-Yageo-datasheet-15895757.pdf?src-supplier=Future+Electronics, ComponentLink12URL=https://datasheet.octopart.com:443/CC0402KRX7R9BB682-Yageo-datasheet-15895757.pdf?src-supplier=Future+Electronics, ComponentLink13Description=https://datasheet.octopart.com:443/CC0402KRX7R9BB682-Yageo-datasheet-12526321.pdf?src-supplier=Future+Electronics, ComponentLink13URL=https://datasheet.octopart.com:443/CC0402KRX7R9BB682-Yageo-datasheet-12526321.pdf?src-supplier=Future+Electronics, ComponentLink14Description=https://datasheet.octopart.com:443/CC0402KRX7R9BB682-Yageo-datasheet-178018872.pdf?src-supplier=Burklin+Elektronik, ComponentLink14URL=https://datasheet.octopart.com:443/CC0402KRX7R9BB682-Yageo-datasheet-178018872.pdf?src-supplier=Burklin+Elektronik, ComponentLink15Description=https://datasheet.octopart.com:443/CC0402KRX7R9BB682-Yageo-Group-datasheet-165992755.pdf?src-supplier=ODG+(Origin+Data+Global), ComponentLink15URL=https://datasheet.octopart.com:443/CC0402KRX7R9BB682-Yageo-Group-datasheet-165992755.pdf?src-supplier=ODG+(Origin+Data+Global), ComponentLink16Description=https://datasheet.octopart.com:443/CC0402KRX7R9BB682-Yageo-datasheet-120101875.pdf?src-supplier=Megastar, ComponentLink16URL=https://datasheet.octopart.com:443/CC0402KRX7R9BB682-Yageo-datasheet-120101875.pdf?src-supplier=Megastar, ComponentLink17Description=https://datasheet.octopart.com:443/CC0402KRX7R9BB682-Yageo-datasheet-62336348.pdf?src-supplier=Newark, ComponentLink17URL=https://datasheet.octopart.com:443/CC0402KRX7R9BB682-Yageo-datasheet-62336348.pdf?src-supplier=Newark, ComponentLink18Description=http://sigma.octopart.com:80/conflict_mineral_statement/Yageo-company-3.pdf?src-supplier=Compliance+Statements, ComponentLink18URL=http://sigma.octopart.com:80/conflict_mineral_statement/Yageo-company-3.pdf?src-supplier=Compliance+Statements, ComponentLink19Description=http://sigma.octopart.com:80/rohs_statement/Yageo-company-2.pdf?src-supplier=Compliance+Statements, ComponentLink19URL=http://sigma.octopart.com:80/rohs_statement/Yageo-company-2.pdf?src-supplier=Compliance+Statements, Composition=Ceramic, Depth=500µm, Halogen Free="Halogen Free", Height=500µm, Lead Free="Lead Free", Length=1mm, Lifecycle Status=Production, Material=Ceramic, Mounting Technology="Surface Mount", Number of Terminals=2, Packaging="Tape and Reel", Pins=2, Pricing="1=0.1, 10=0.024, 50=0.0156, 100=0.0133, 500=0.00934, 1000=0.00812, 2500=0.00685, 5000=0.00609 (USD)", Radiation Hardening=No, REACH SVHC=Yes, RoHS=Compliant, Schedule B="8532240020, 8532240020|8532240020|8532240020|8532240020|8532240020|8532240020|8532240020|8532240020|8532240020|8532240020|8532240020|8532240020|8532240020|8532240020|8532240020|8532240020|8532240020|8532240020|8532240020|8532240020|8532240020|8532240020|8532240020|85", Stock=93415, Supplier=DigiKey, Termination=SMD/SMT, Thickness=558.8µm, Voltage Rating=50V, Voltage Rating (DC)=50V, Weight=652.039032µg, Width=500µm
C4 C19 C35 C39 C40 C41 C42 C43 C44: library part 0805B475K500NT, "4.7uF 50V X7R ±10% 0805 Multilayer Ceramic Capacitors MLCC - SMD/SMT ROHS", Case Code (Imperial)=0402, Case Code (Metric)=1005, Dielectric=X7R, Dielectric Material=Ceramic, Manufacturer="Yageo Group", Manufacturer Part Number=CC0402KRX7R9BB682, Max Operating Temperature=125°C, Min Operating Temperature=-55°C, Supplier Part Number=311-1726-1-ND, Temperature Coefficient=30ppm/°C, Tolerance=10%, Voltage=50V, Case/Package=0402, Category="Ceramic Capacitors", China RoHS=Compliant, ComponentLink1Description=https://datasheet.octopart.com:443/CC0402KRX7R9BB682-Yageo-datasheet-177165144.pdf?src-supplier=IHS, ComponentLink1URL=https://datasheet.octopart.com:443/CC0402KRX7R9BB682-Yageo-datasheet-177165144.pdf?src-supplier=IHS, ComponentLink2Description=https://datasheet.octopart.com:443/CC0402KRX7R9BB682-Yageo-datasheet-78855684.pdf?src-supplier=Upverter, ComponentLink2URL=https://datasheet.octopart.com:443/CC0402KRX7R9BB682-Yageo-datasheet-78855684.pdf?src-supplier=Upverter, ComponentLink3Description=https://datasheet.octopart.com:443/CC0402KRX7R9BB682-Yageo-datasheet-147453679.pdf?src-supplier=Farnell, ComponentLink3URL=https://datasheet.octopart.com:443/CC0402KRX7R9BB682-Yageo-datasheet-147453679.pdf?src-supplier=Farnell, ComponentLink4Description=https://datasheet.octopart.com:443/CC0402KRX7R9BB682-Yageo-datasheet-182029474.pdf?src-supplier=Farnell, ComponentLink4URL=https://datasheet.octopart.com:443/CC0402KRX7R9BB682-Yageo-datasheet-182029474.pdf?src-supplier=Farnell, ComponentLink5Description=https://datasheet.octopart.com:443/CC0402KRX7R9BB682-Yageo-datasheet-140260305.pdf?src-supplier=element14+APAC, ComponentLink5URL=https://datasheet.octopart.com:443/CC0402KRX7R9BB682-Yageo-datasheet-140260305.pdf?src-supplier=element14+APAC, ComponentLink6Description=https://datasheet.octopart.com/CC0402KRX7R9BB682-Yageo-datasheet-10883670.pdf, ComponentLink6URL=https://datasheet.octopart.com/CC0402KRX7R9BB682-Yageo-datasheet-10883670.pdf, ComponentLink7Description=https://datasheet.octopart.com:443/CC0402KRX7R9BB682-Yageo-datasheet-166511530.pdf?src-supplier=Future+Electronics, ComponentLink7URL=https://datasheet.octopart.com:443/CC0402KRX7R9BB682-Yageo-datasheet-166511530.pdf?src-supplier=Future+Electronics, ComponentLink8Description=https://datasheet.octopart.com:443/CC0402KRX7R9BB682-Yageo-datasheet-137700082.pdf?src-supplier=Future+Electronics, ComponentLink8URL=https://datasheet.octopart.com:443/CC0402KRX7R9BB682-Yageo-datasheet-137700082.pdf?src-supplier=Future+Electronics, ComponentLink9Description=https://datasheet.octopart.com:443/CC0402KRX7R9BB682-Yageo-datasheet-137700084.pdf?src-supplier=Future+Electronics, ComponentLink9URL=https://datasheet.octopart.com:443/CC0402KRX7R9BB682-Yageo-datasheet-137700084.pdf?src-supplier=Future+Electronics, ComponentLink10Description=https://datasheet.octopart.com:443/CC0402KRX7R9BB682-Yageo-datasheet-27626582.pdf?src-supplier=Future+Electronics, ComponentLink10URL=https://datasheet.octopart.com:443/CC0402KRX7R9BB682-Yageo-datasheet-27626582.pdf?src-supplier=Future+Electronics, ComponentLink11Description=https://datasheet.octopart.com:443/CC0402KRX7R9BB682-Yageo-datasheet-24578986.pdf?src-supplier=Future+Electronics, ComponentLink11URL=https://datasheet.octopart.com:443/CC0402KRX7R9BB682-Yageo-datasheet-24578986.pdf?src-supplier=Future+Electronics, ComponentLink12Description=https://datasheet.octopart.com:443/CC0402KRX7R9BB682-Yageo-datasheet-15895757.pdf?src-supplier=Future+Electronics, ComponentLink12URL=https://datasheet.octopart.com:443/CC0402KRX7R9BB682-Yageo-datasheet-15895757.pdf?src-supplier=Future+Electronics, ComponentLink13Description=https://datasheet.octopart.com:443/CC0402KRX7R9BB682-Yageo-datasheet-12526321.pdf?src-supplier=Future+Electronics, ComponentLink13URL=https://datasheet.octopart.com:443/CC0402KRX7R9BB682-Yageo-datasheet-12526321.pdf?src-supplier=Future+Electronics, ComponentLink14Description=https://datasheet.octopart.com:443/CC0402KRX7R9BB682-Yageo-datasheet-178018872.pdf?src-supplier=Burklin+Elektronik, ComponentLink14URL=https://datasheet.octopart.com:443/CC0402KRX7R9BB682-Yageo-datasheet-178018872.pdf?src-supplier=Burklin+Elektronik, ComponentLink15Description=https://datasheet.octopart.com:443/CC0402KRX7R9BB682-Yageo-Group-datasheet-165992755.pdf?src-supplier=ODG+(Origin+Data+Global), ComponentLink15URL=https://datasheet.octopart.com:443/CC0402KRX7R9BB682-Yageo-Group-datasheet-165992755.pdf?src-supplier=ODG+(Origin+Data+Global), ComponentLink16Description=https://datasheet.octopart.com:443/CC0402KRX7R9BB682-Yageo-datasheet-120101875.pdf?src-supplier=Megastar, ComponentLink16URL=https://datasheet.octopart.com:443/CC0402KRX7R9BB682-Yageo-datasheet-120101875.pdf?src-supplier=Megastar, ComponentLink17Description=https://datasheet.octopart.com:443/CC0402KRX7R9BB682-Yageo-datasheet-62336348.pdf?src-supplier=Newark, ComponentLink17URL=https://datasheet.octopart.com:443/CC0402KRX7R9BB682-Yageo-datasheet-62336348.pdf?src-supplier=Newark, ComponentLink18Description=http://sigma.octopart.com:80/conflict_mineral_statement/Yageo-company-3.pdf?src-supplier=Compliance+Statements, ComponentLink18URL=http://sigma.octopart.com:80/conflict_mineral_statement/Yageo-company-3.pdf?src-supplier=Compliance+Statements, ComponentLink19Description=http://sigma.octopart.com:80/rohs_statement/Yageo-company-2.pdf?src-supplier=Compliance+Statements, ComponentLink19URL=http://sigma.octopart.com:80/rohs_statement/Yageo-company-2.pdf?src-supplier=Compliance+Statements, Composition=Ceramic, Depth=500µm, Halogen Free="Halogen Free", Height=500µm, Lead Free="Lead Free", Length=1mm, Lifecycle Status=Production, Material=Ceramic, Mounting Technology="Surface Mount", Number of Terminals=2, Packaging="Tape and Reel", Pins=2, Pricing="1=0.1, 10=0.024, 50=0.0156, 100=0.0133, 500=0.00934, 1000=0.00812, 2500=0.00685, 5000=0.00609 (USD)", Radiation Hardening=No, REACH SVHC=Yes, RoHS=Compliant, Schedule B="8532240020, 8532240020|8532240020|8532240020|8532240020|8532240020|8532240020|8532240020|8532240020|8532240020|8532240020|8532240020|8532240020|8532240020|8532240020|8532240020|8532240020|8532240020|8532240020|8532240020|8532240020|8532240020|8532240020|8532240020|85", Stock=93415, Supplier=DigiKey, Termination=SMD/SMT, Thickness=558.8µm, Voltage Rating=50V, Voltage Rating (DC)=50V, Weight=652.039032µg, Width=500µm